# Altium PCB SD_Card_PCB.PcbDoc (part 1 of 2)
Units mil, origin at the board's own origin, x right, y up, seen from the top; angles counter-clockwise.
Board outline 5600 x 4000 mil, 4 copper layers (Top Layer, Plane(Gnd), Plane(Pwr), Bottom Layer), stack 23.756 mil thick; 198 components, 190 nets, 528 pads, 167 vias.
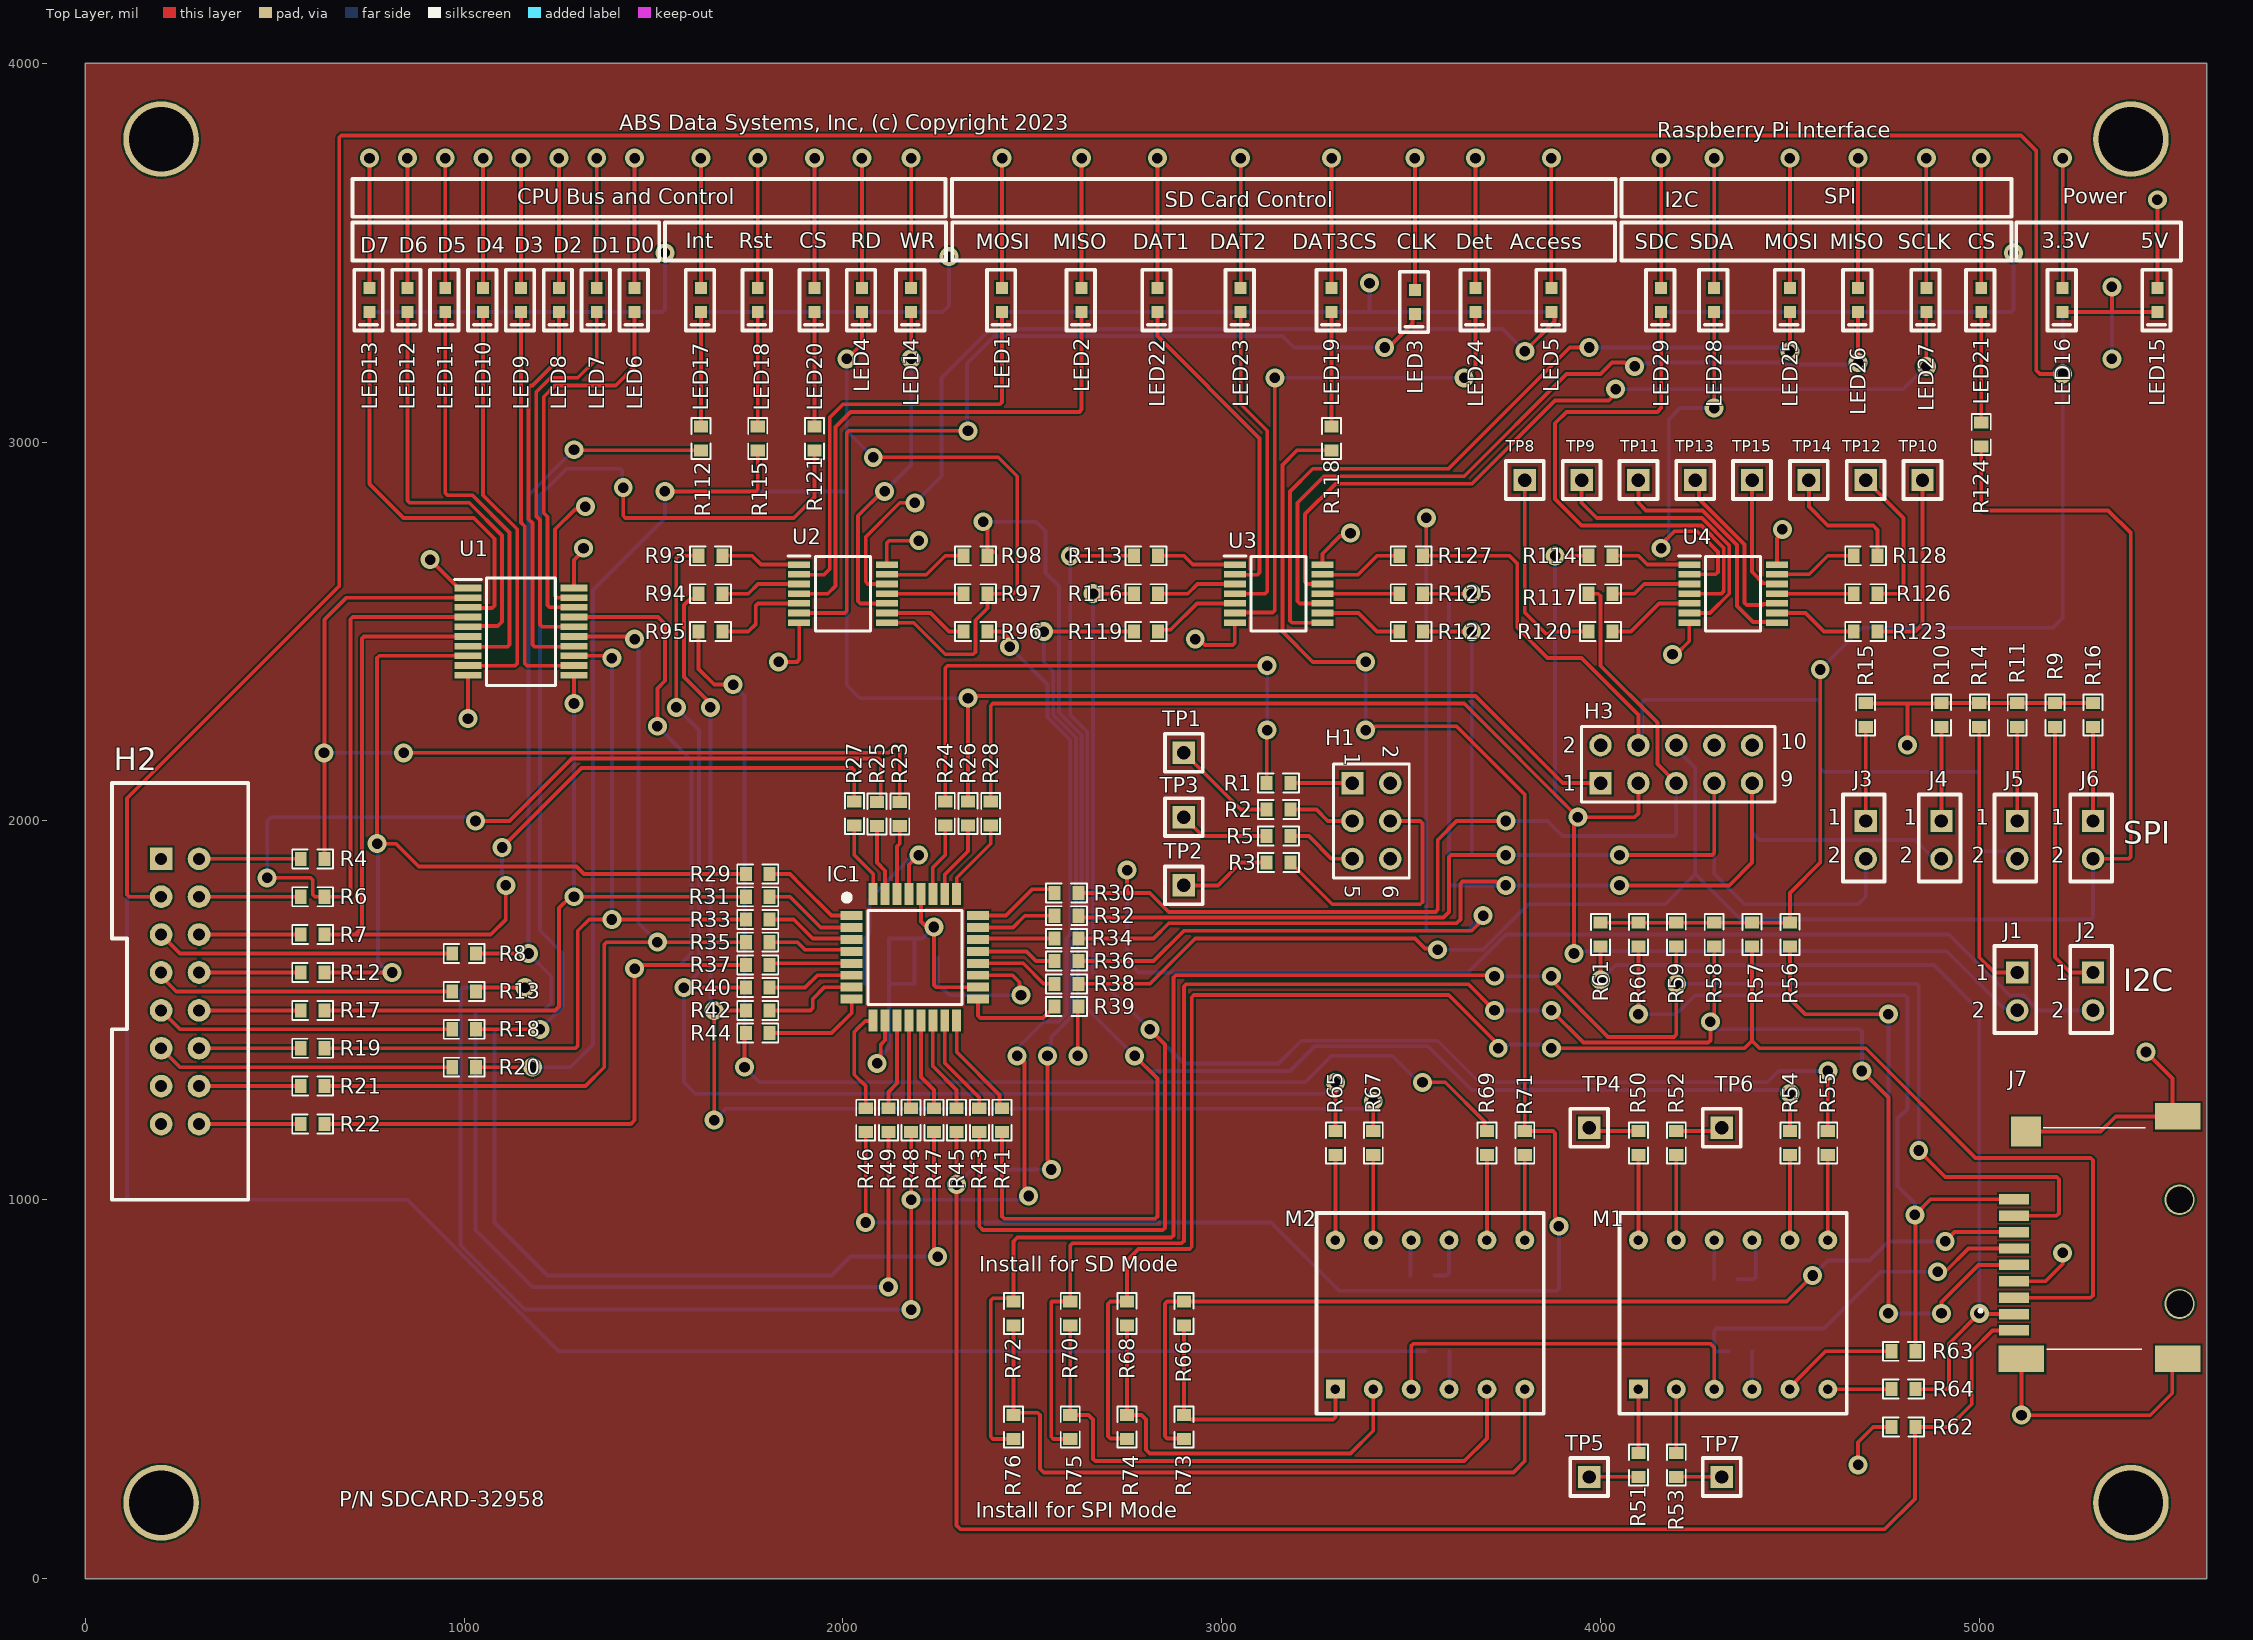
[diagram p0: Top Layer view]
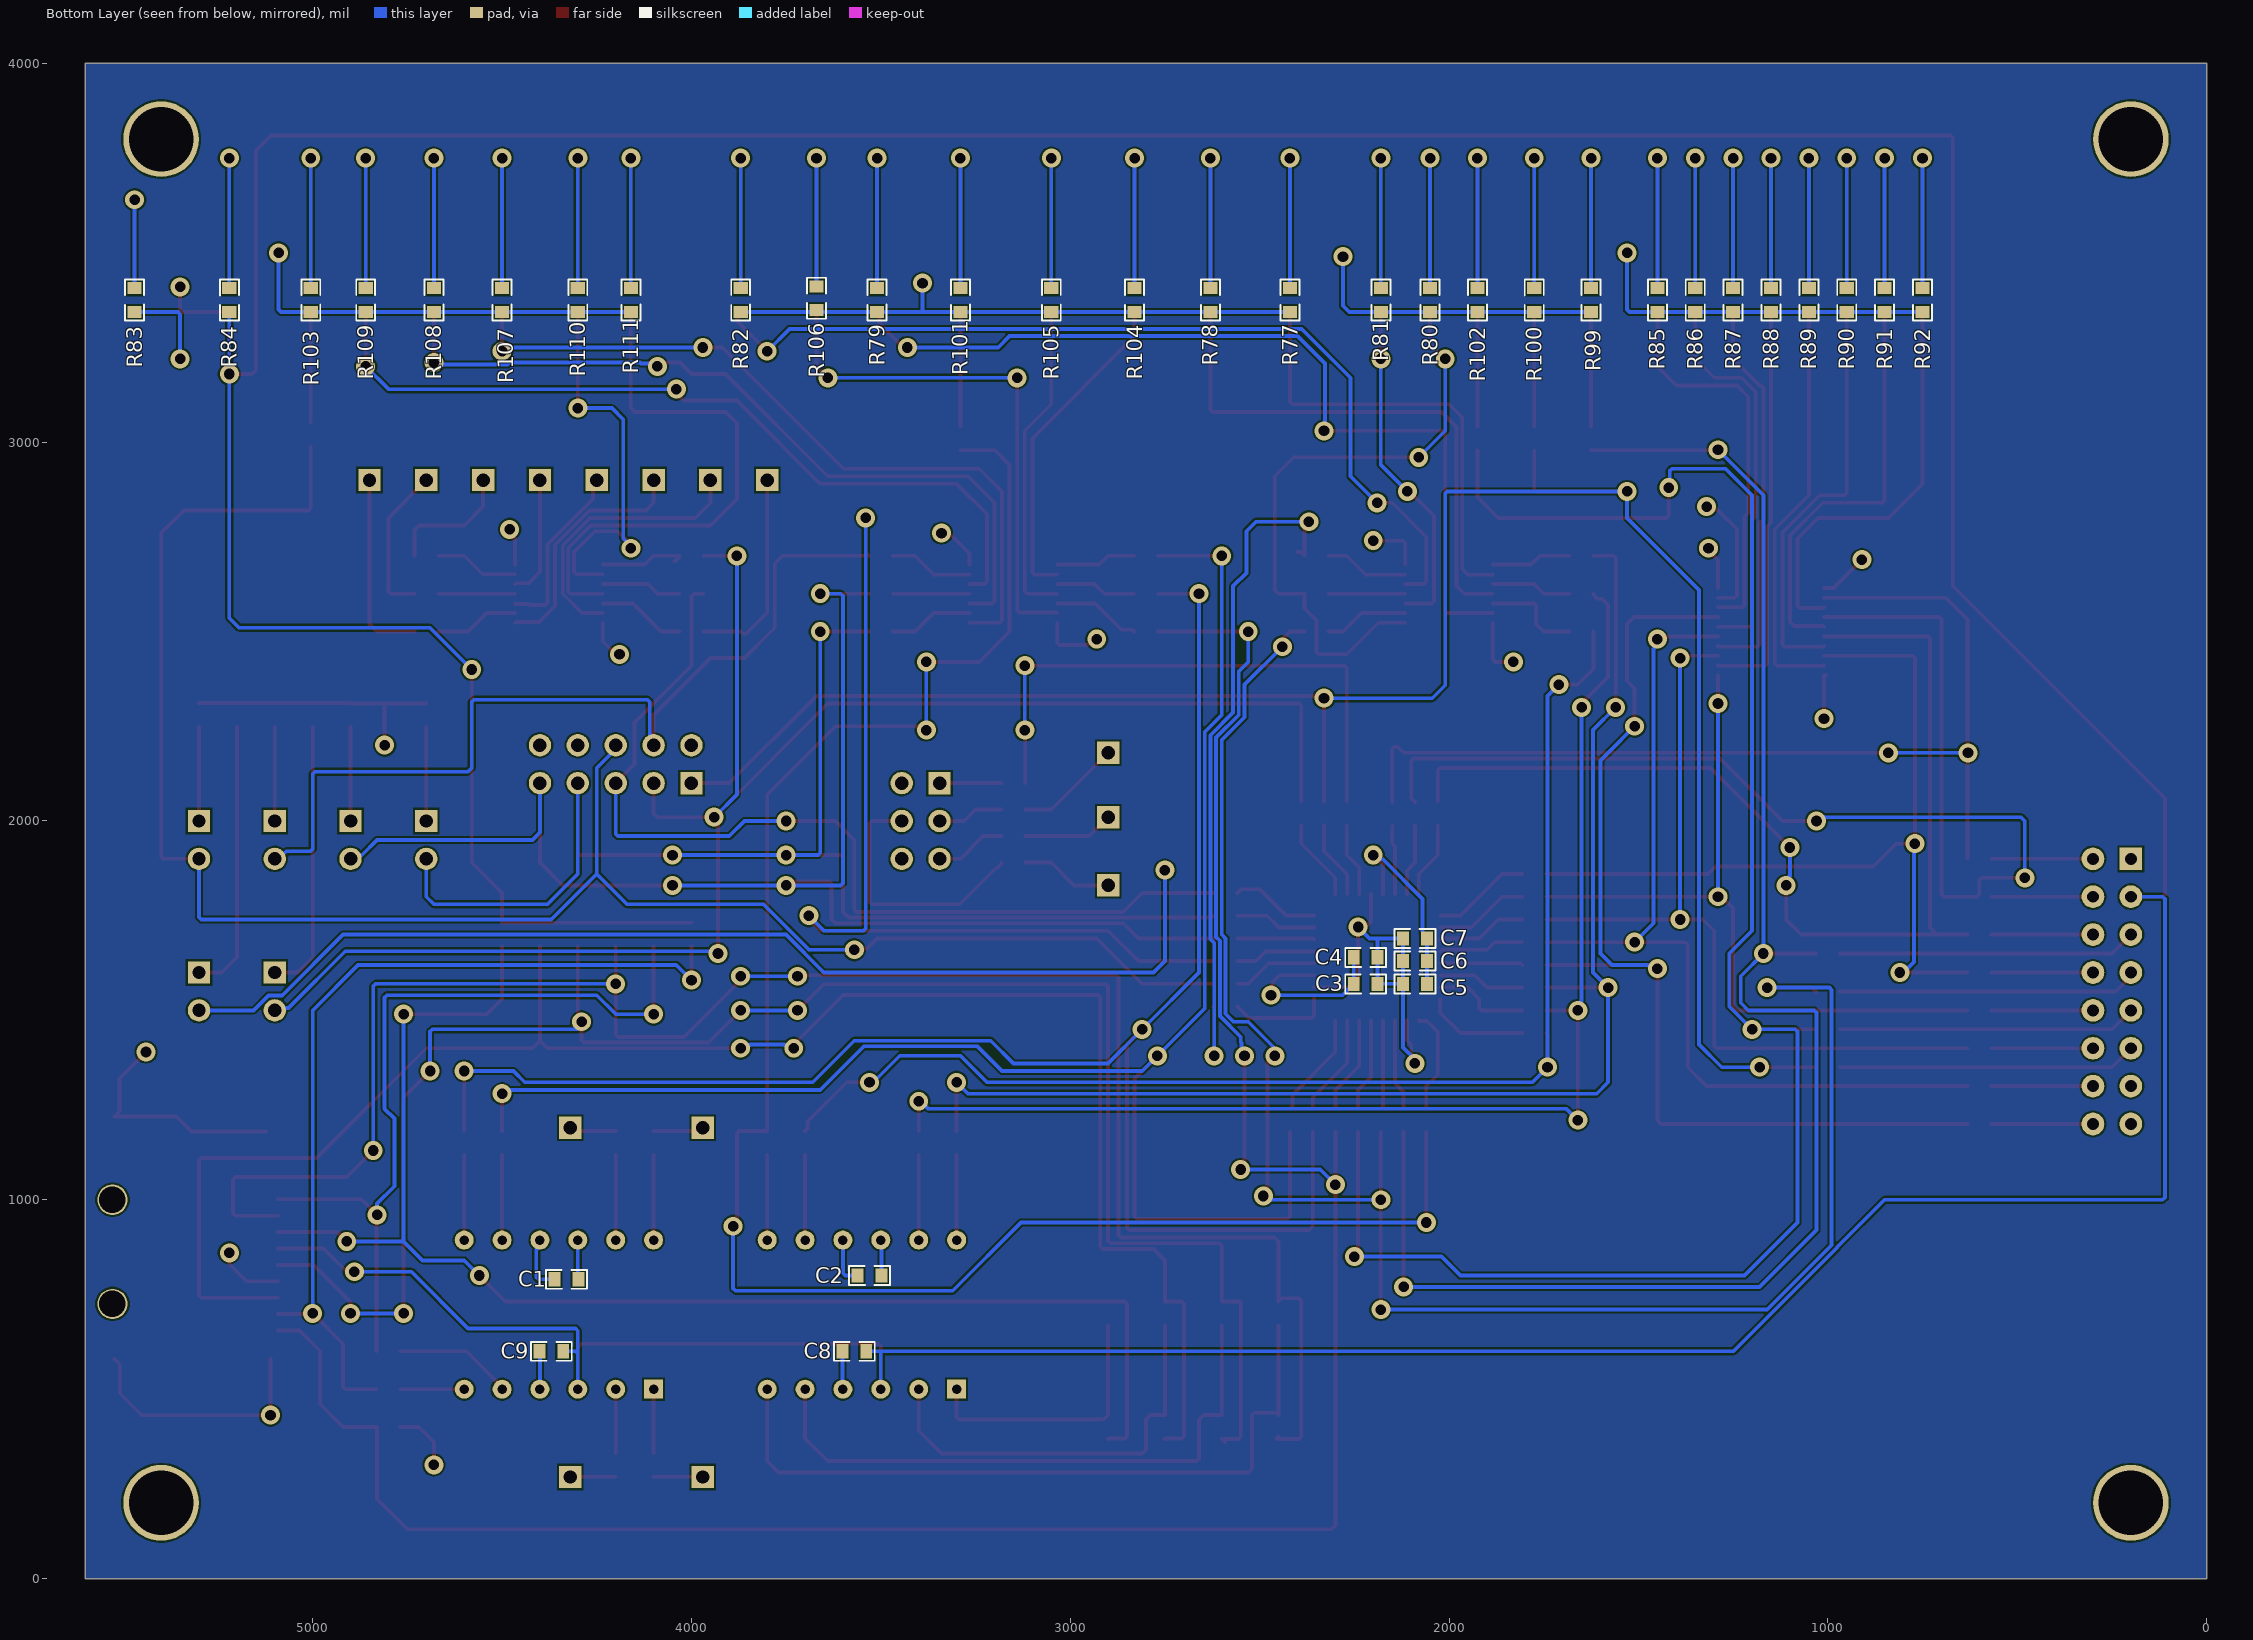
[diagram p1: Bottom Layer view, seen from below]
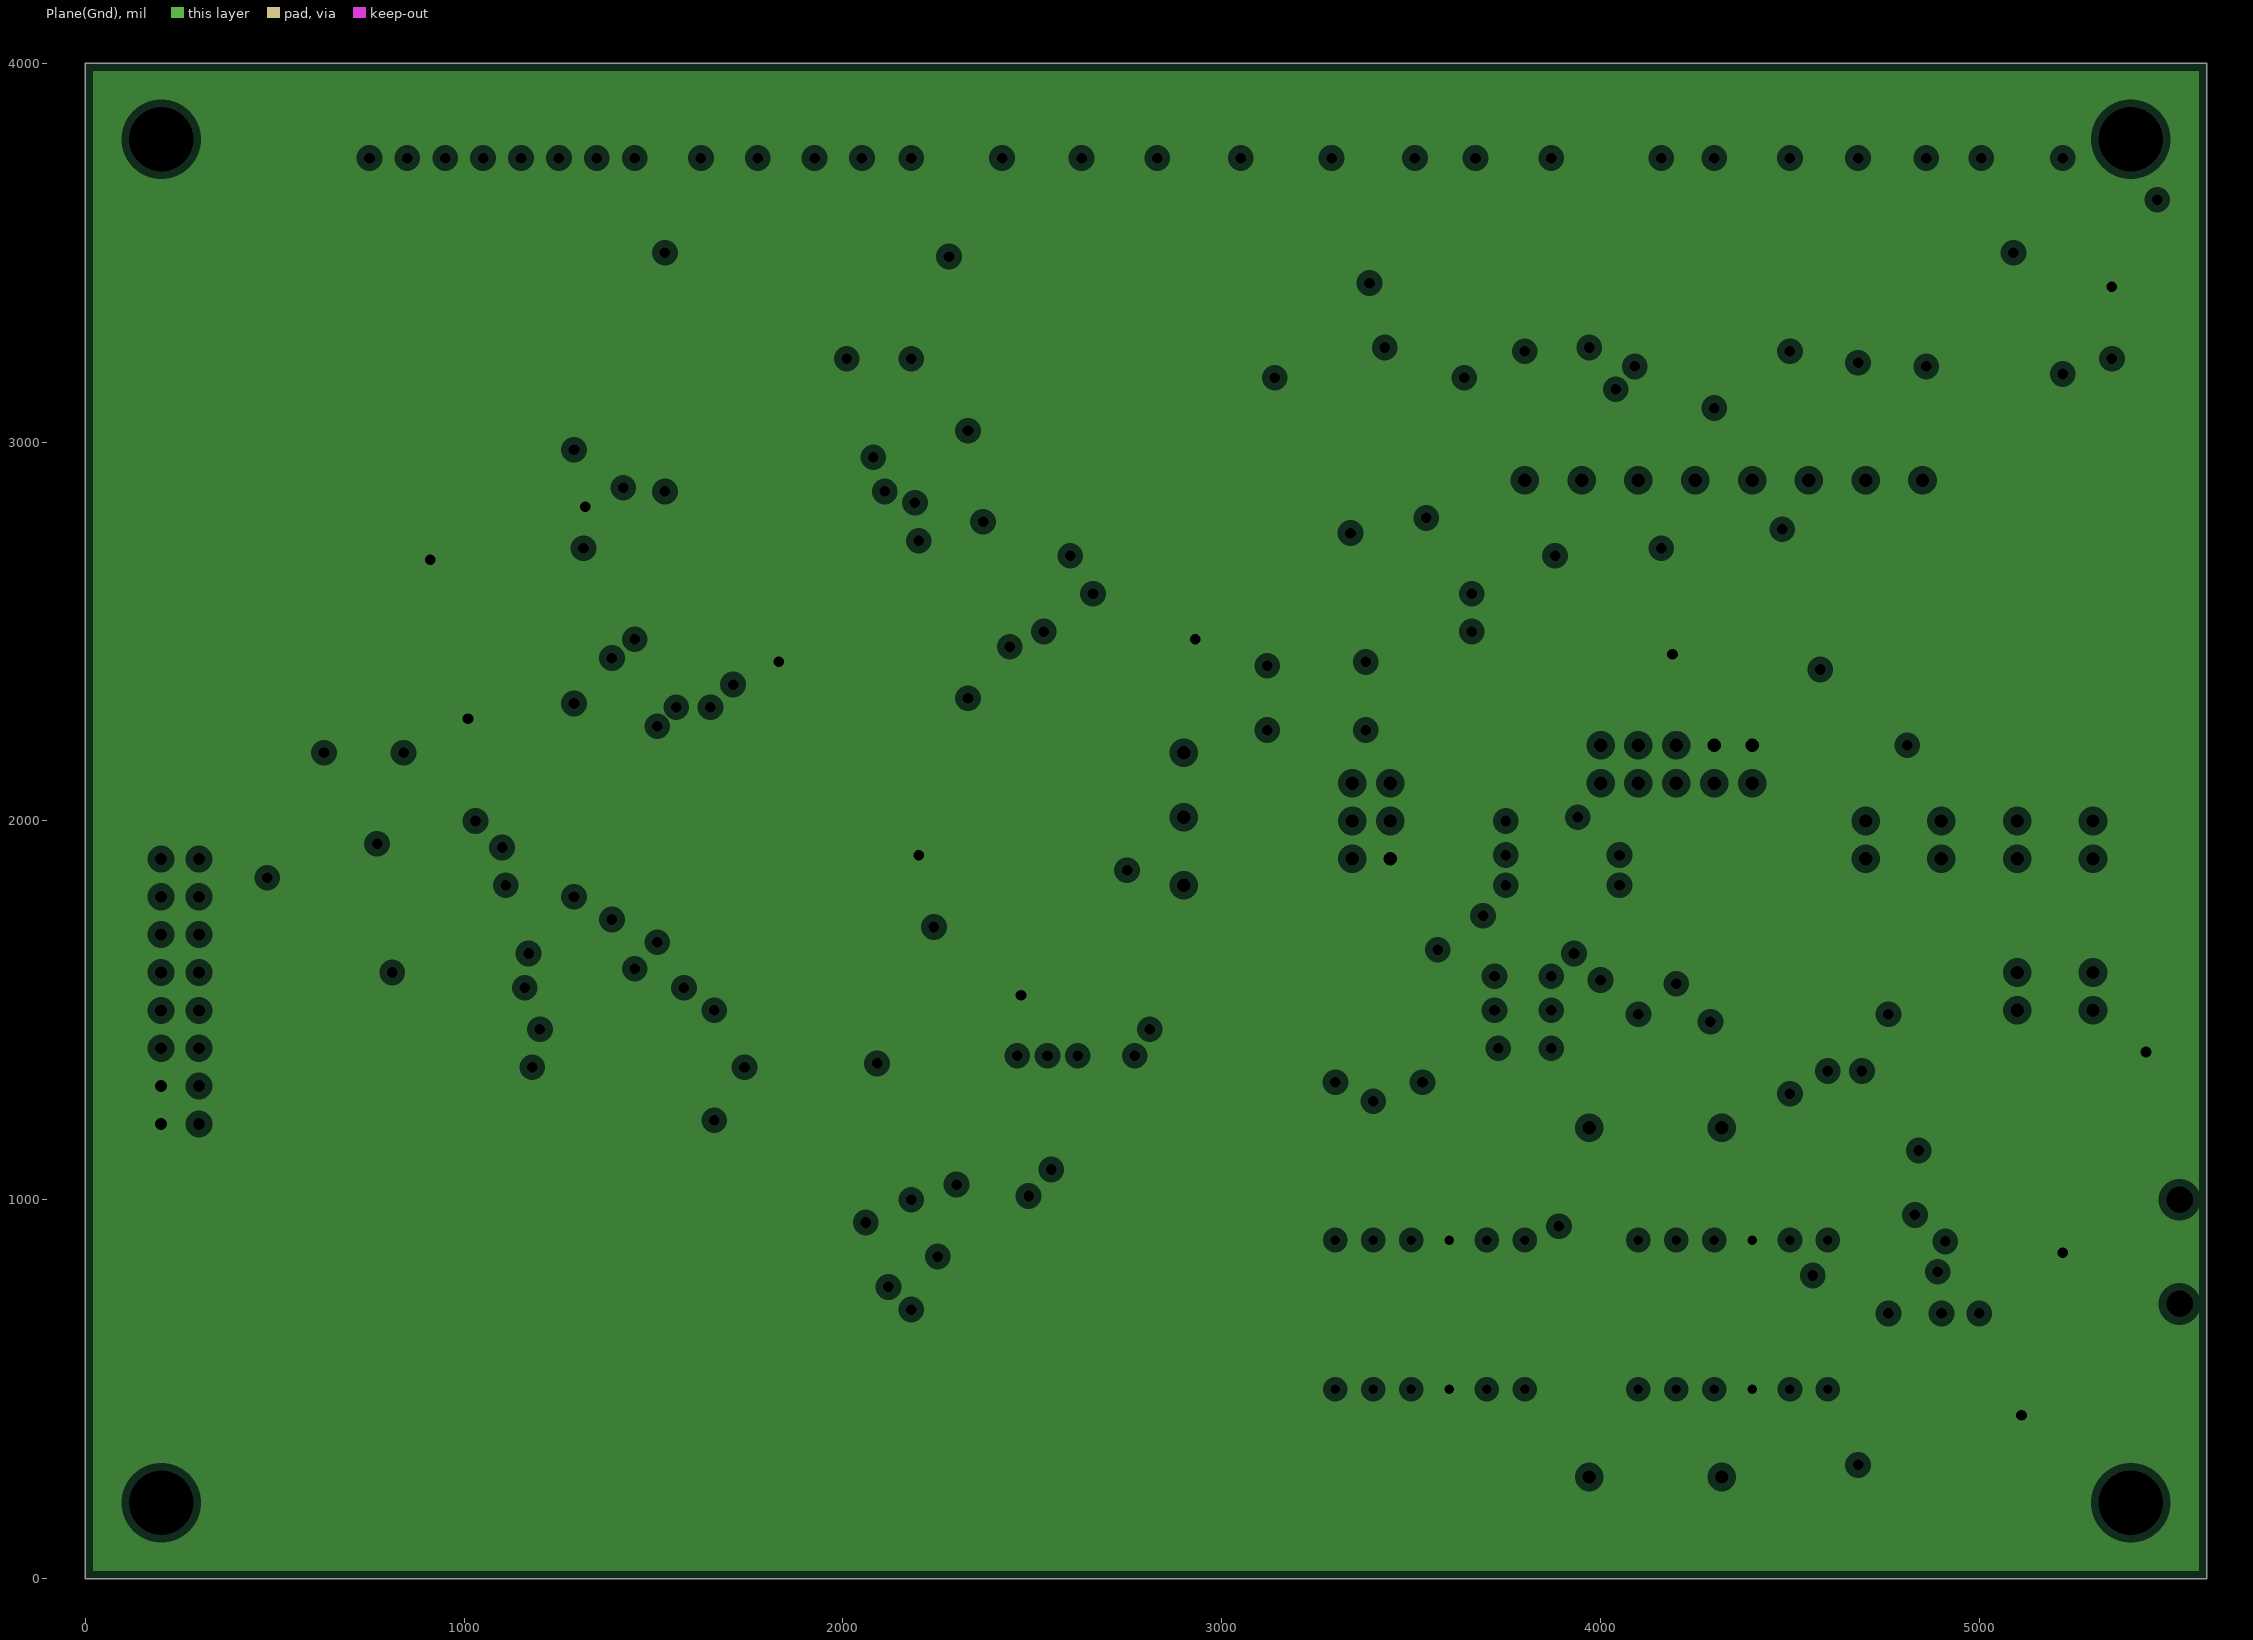
[diagram p2: Plane(Gnd), clearances drawn from the general rule]
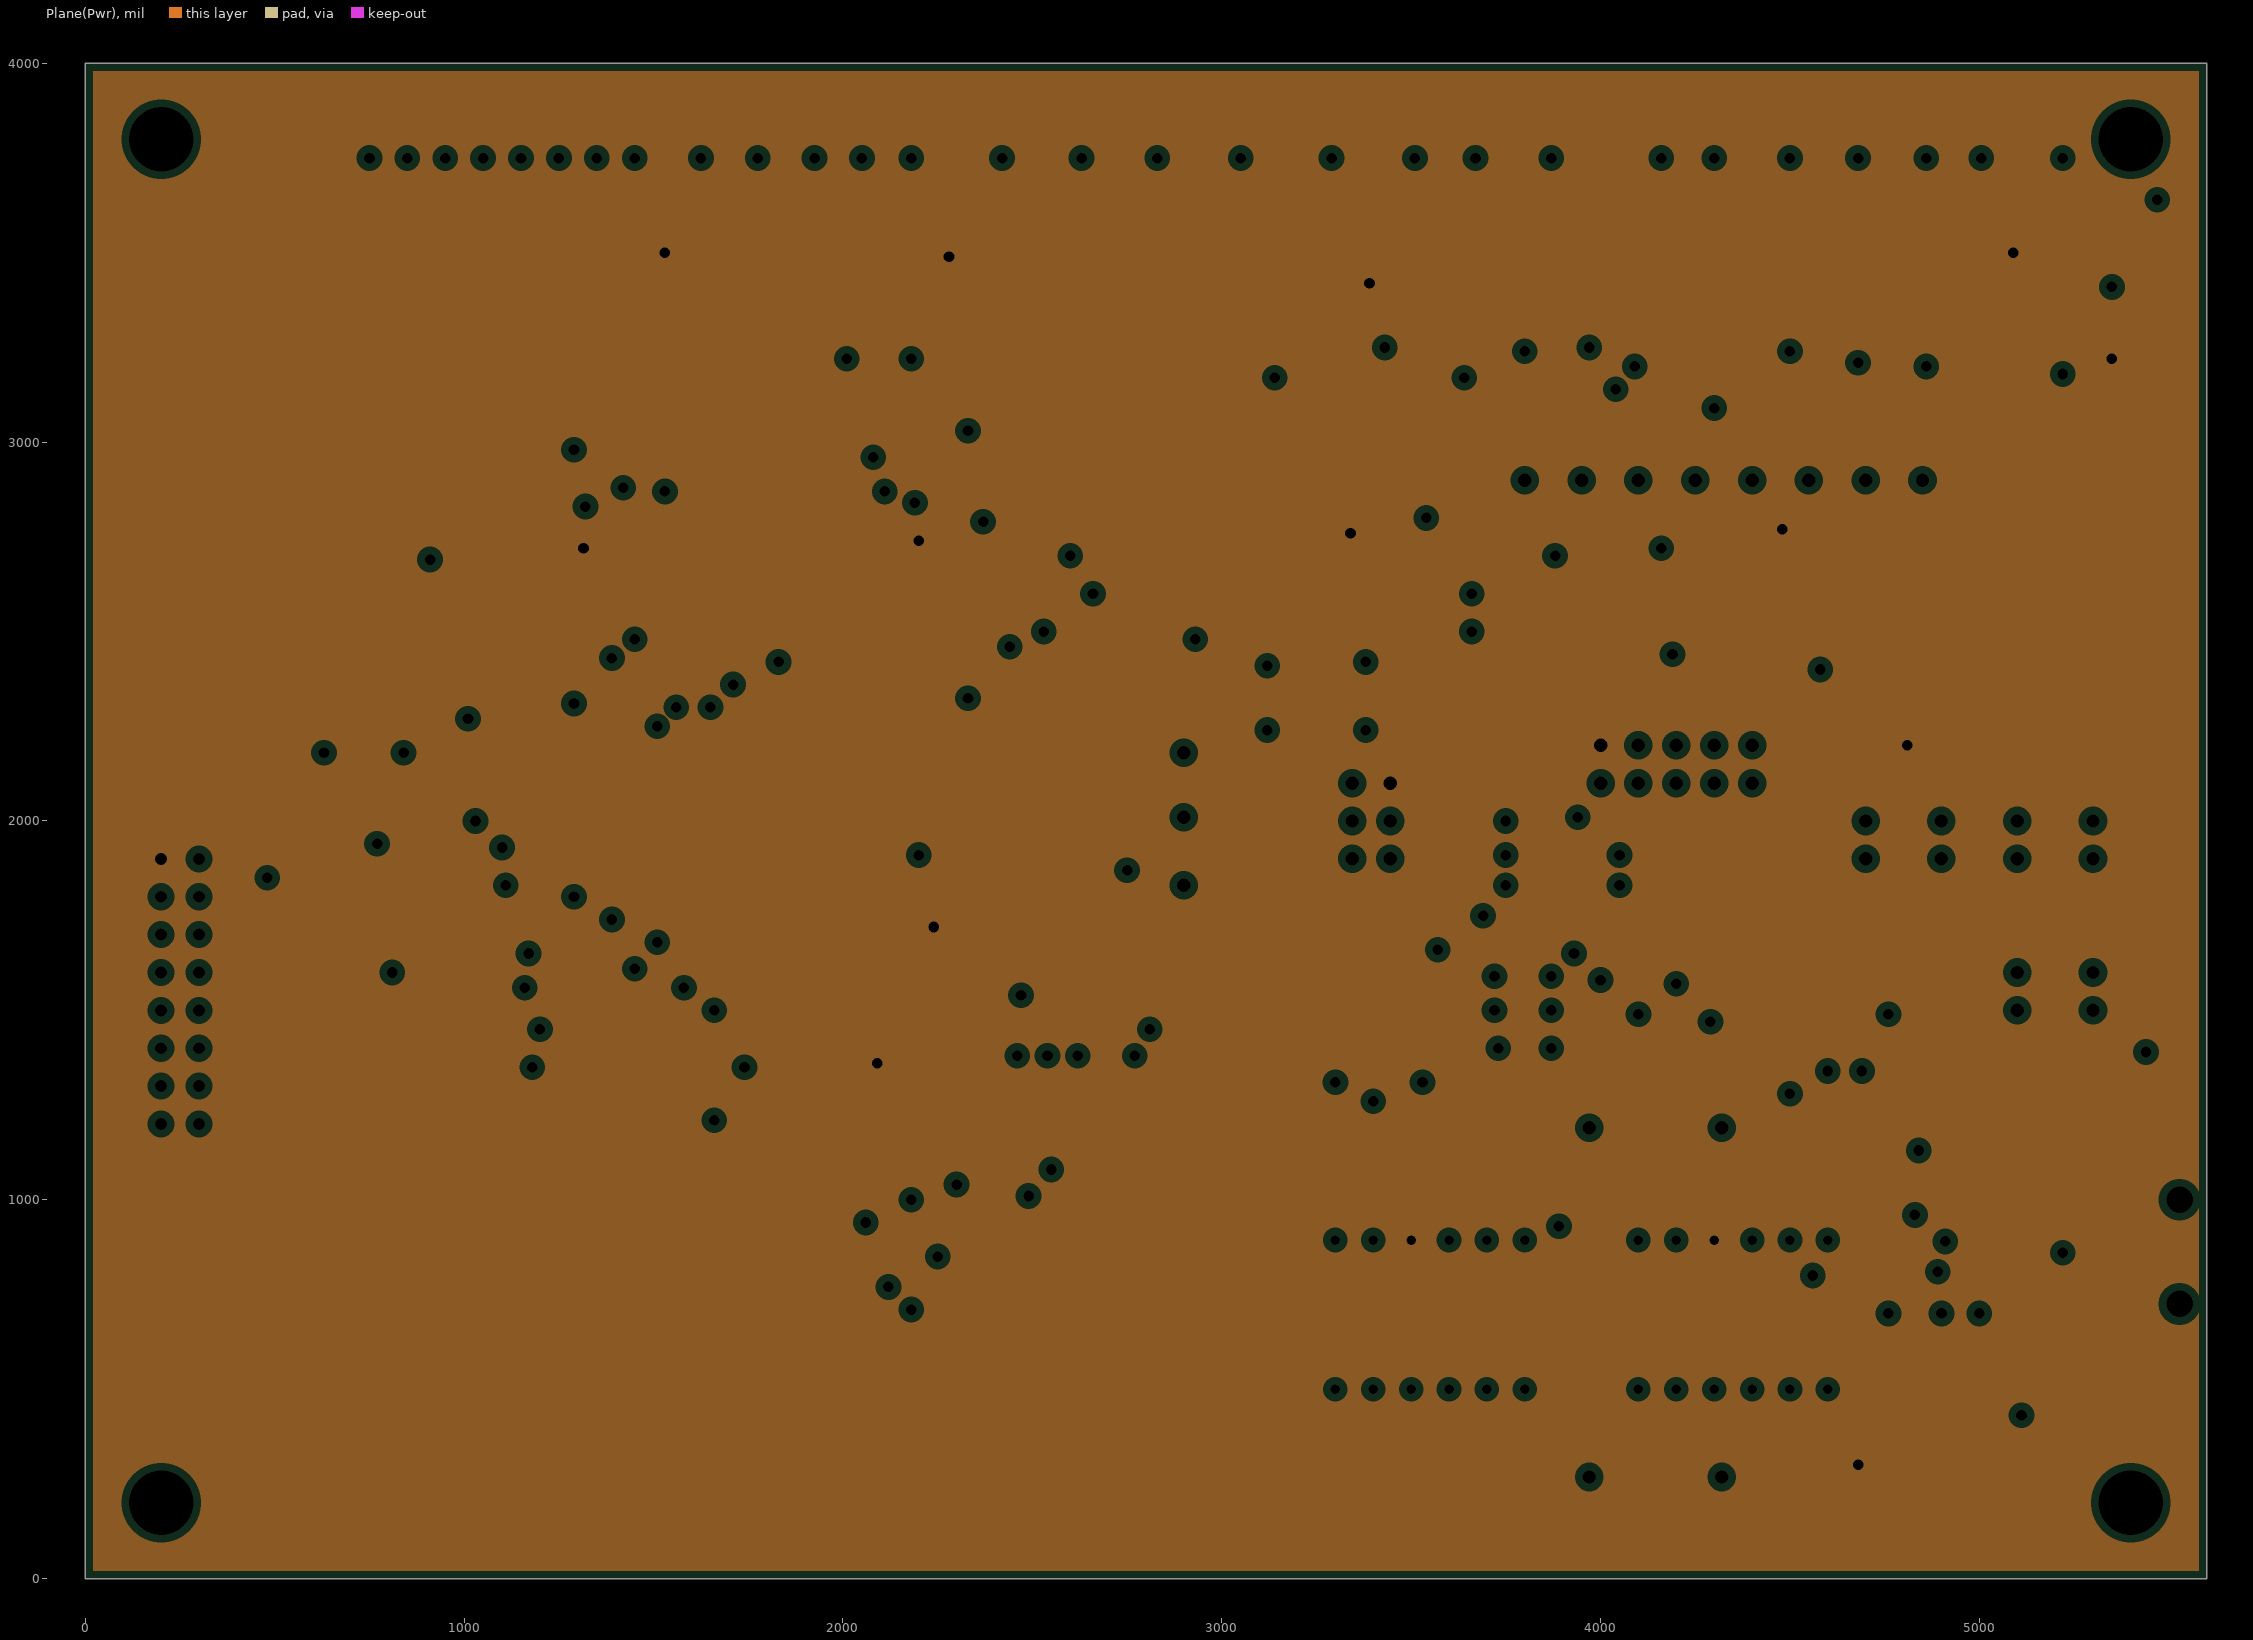
[diagram p3: Plane(Pwr), clearances drawn from the general rule]
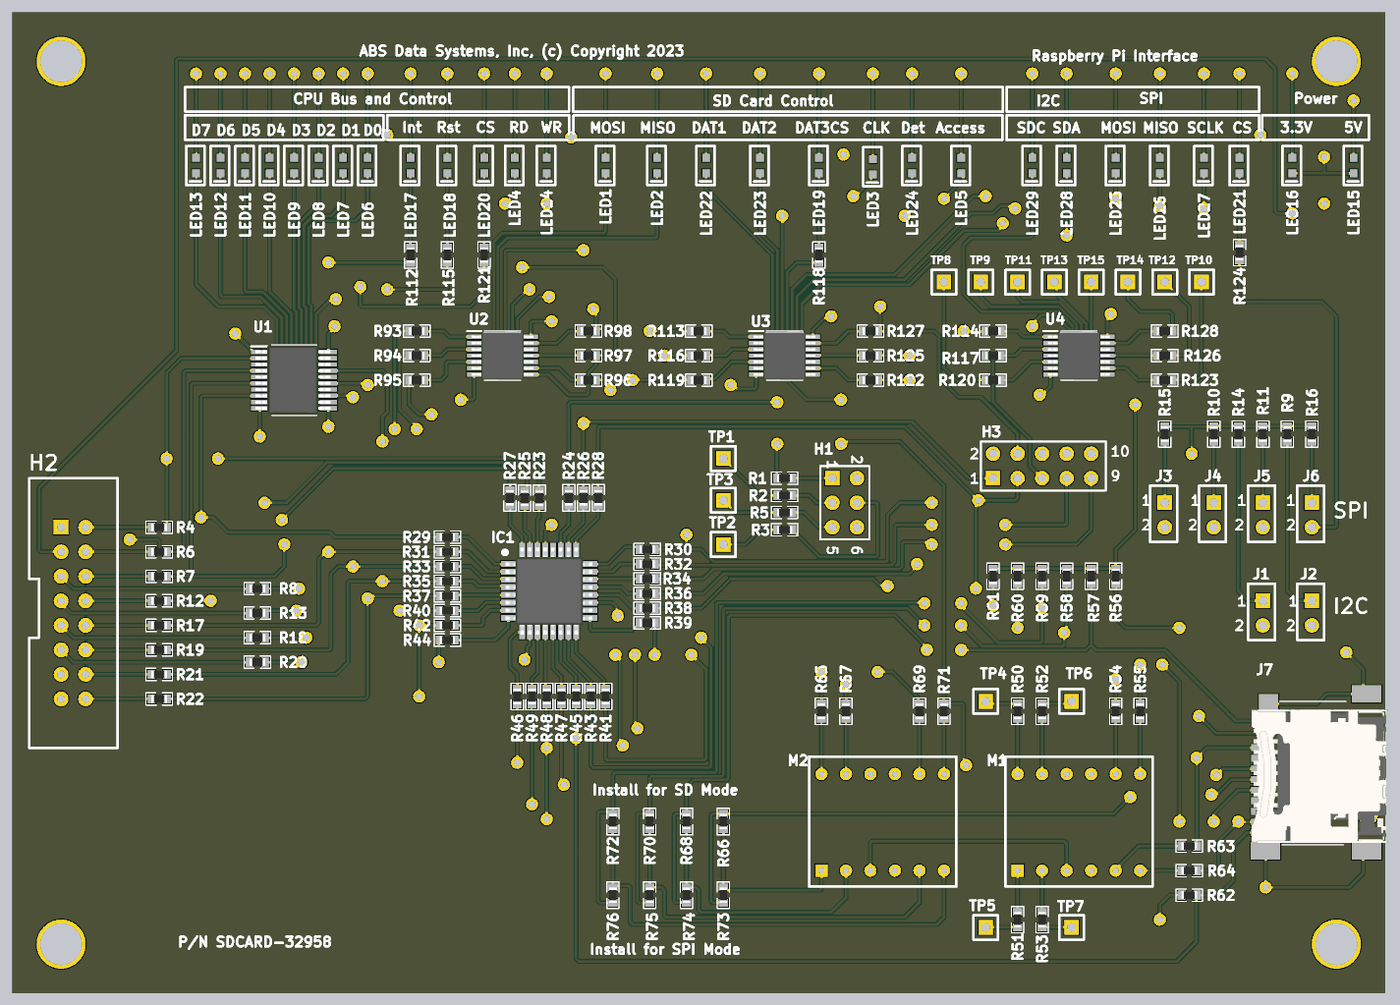
[diagram p5: 3D render of the assembled board from above, using the file's embedded part models]
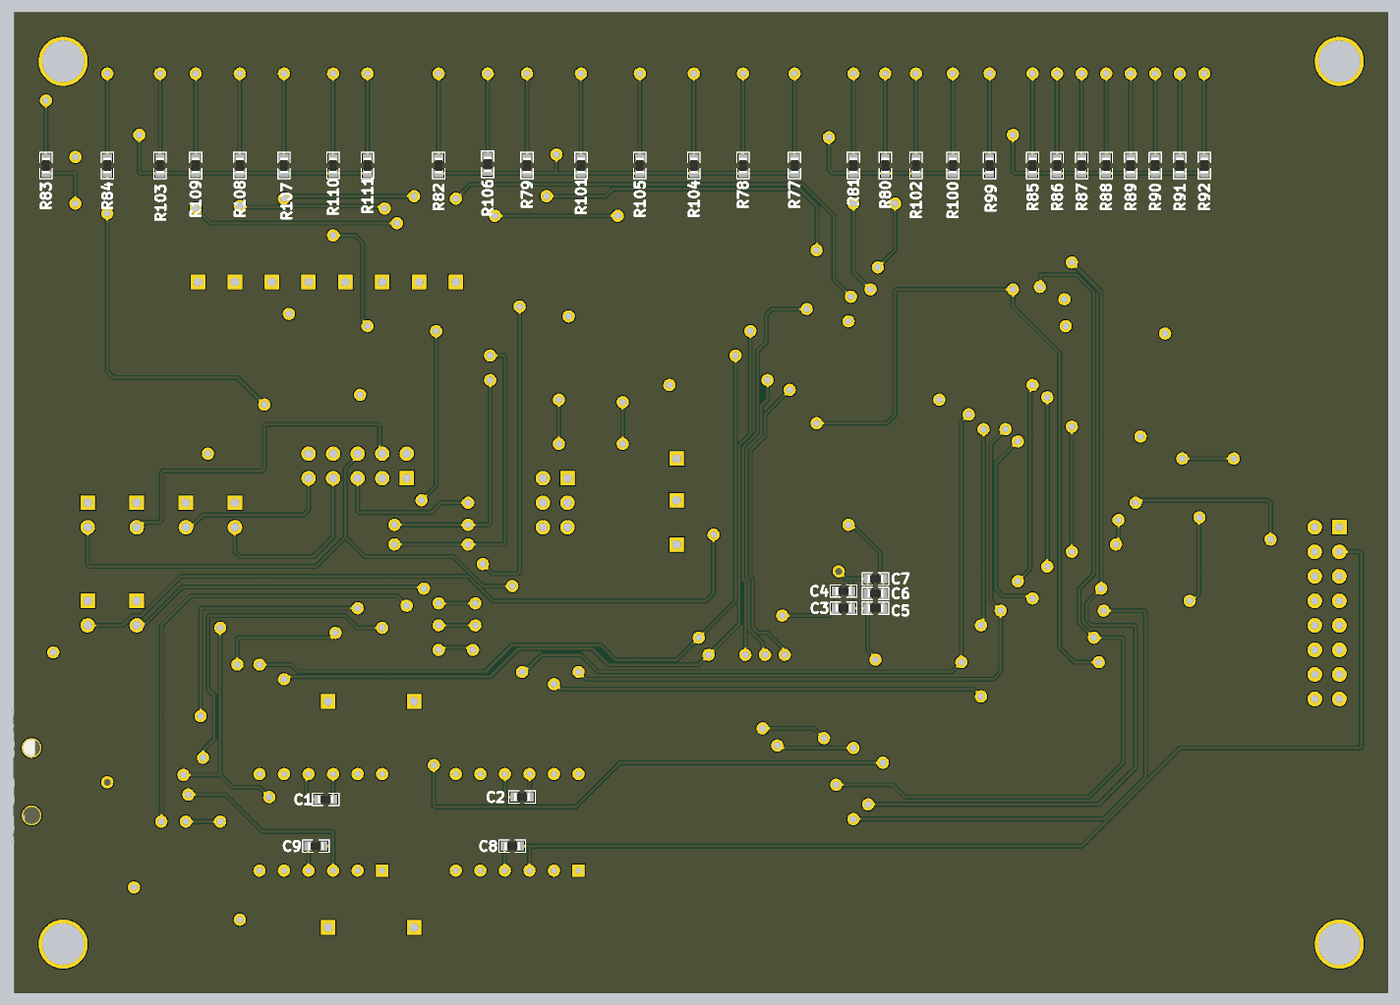
[diagram p6: 3D render of the assembled board from below, using the file's embedded part models]

## Layer stack, top to bottom
Top Solder: solder mask 0.4, Solder Resist, Dk 3.5
Top Layer: signal copper 1.4
Dielectric 2: prepreg 2.8, PP-006, Dk 4.1
Plane(Gnd): plane copper 1.378, net GND
Dielectric 1: dielectric 12.6, FR-4, Dk 4.8
Plane(Pwr): plane copper 1.378, net +5
Dielectric 3: prepreg 2.8, PP-006, Dk 4.1
Bottom Layer: signal copper 1.4
Bottom Solder: solder mask 0.4, Solder Resist, Dk 3.5

## Board outline
0,0 0,4000 5600,4000 5600,0

## Design rules (kind name [scope] priority, off if disabled: settings)
Clearance [All] p1: gap=5 ignorepadtopadclearanceinfootprint=FALSE
HoleSize [All] p1: absolutevalues=TRUE maxlimit=200 minlimit=1 maxpercent=80.000 minpercent=20.000
HoleToHoleClearance [All] p1: gap=5 allowstackedmicrovias=TRUE
MinimumSolderMaskSliver [All] p1: minsoldermaskwidth=5
PlaneClearance [All] p1: clearance=20
PlaneConnect [All] p1: planeconnectstyle=Relief reliefexpansion=20 reliefentries=4 reliefconductorwidth=10 reliefairgap=10
PolygonConnect [All] p1: connectstyle=Relief reliefconductorwidth=10 reliefentries=4 polygonreliefangle="90 Angle" airgapwidth=10
RoutingVias [All] p1: holewidth=28 width=50 viastyle="Through Hole" minholewidth=28 minwidth=50 maxholewidth=28 maxwidth=50
SilkToSilkClearance [All] p1: silktosilkclearance=4
SilkToSolderMaskClearance [IsPad] p1: minsilkscreentomaskgap=3.5 clearancetoexposedcopper=TRUE
SolderMaskExpansion [All] p1: expansion=4 istentingtop=FALSE
Width [All] p1: maxlimit=10 minlimit=5 preferedwidth=10 minimp=50.000000 maximp=50.000000 favimp=50.000000
23 further rules are at their usual default settings.

## Components (designator, comment, footprint, x,y, rotation, side; value= is the part's Value field where it differs from the comment)
C1 "100nf" 0603 4330,790 r0 bottom
C2 "100nf" 0603 3530,800 r0 bottom
C3 "100nf" 0603 2220,1570 r0 bottom
C4 "1nf" 0603 2220,1640 r0 bottom
C5 "1uf" 0603 2090,1570 r180 bottom
C6 "100nf" 0603 2090,1630 r180 bottom
C7 "100nf" 0603 2090,1690 r180 bottom
C8 "100nf" 0603 3570,600 r0 bottom locked
C9 "100nf" 0603 4370,600 r0 bottom locked
H1 "UDPI Programmer" HDR2X3 3345,2100 r270 top locked
H2 "Header_IDC_2x8" HEADER16 200,1900 r0 top locked
H3 "Header_IDC_2x5" HDR2X5 4000,2100 r0 top locked
IC1 "AVR64DD32_SDCard" QFP80P900X900X120-32N 2190,1640 r0 top locked
J1 "Jumper" Jumper 5100,1600 r180 top
J2 "Jumper" Jumper 5300,1600 r180 top
J3 "Jumper" Jumper 4700,2000 r180 top
J4 "Jumper" Jumper 4900,2000 r180 top
J5 "Jumper" Jumper 5100,2000 r180 top
J6 "Jumper" Jumper 5300,2000 r180 top
J7 "SD Micro Card Socket - Amazon" SDMICROCONNECTOR 5310,900 r270 top locked
LED1 "green" 0603_Diode 2420,3375 r90 top locked
LED2 "green" 0603_Diode 2630,3375 r90 top locked
LED3 "green" 0603_Diode 3510,3370 r90 top
LED4 "green" 0603_Diode 2050,3375 r90 top locked
LED5 "green" 0603_Diode 3870,3375 r90 top
LED6 "green" 0603_Diode 1450,3375 r90 top
LED7 "green" 0603_Diode 1350,3375 r90 top
LED8 "green" 0603_Diode 1250,3375 r90 top
LED9 "green" 0603_Diode 1150,3375 r90 top
LED10 "green" 0603_Diode 1050,3375 r90 top
LED11 "green" 0603_Diode 950,3375 r90 top
LED12 "green" 0603_Diode 850,3375 r90 top
LED13 "green" 0603_Diode 750,3375 r90 top
LED14 "red" 0603_Diode 2180,3375 r90 top locked
LED15 "red" 0603_Diode 5470,3375 r90 top
LED16 "amber" 0603_Diode 5220,3375 r90 top
LED17 "amber" 0603_Diode 1625,3375 r90 top locked
LED18 "blue" 0603_Diode 1775,3375 r90 top locked
LED19 "green" 0603_Diode 3290,3375 r90 top locked
LED20 "green" 0603_Diode 1925,3375 r90 top locked
LED21 "green" 0603_Diode 5005,3375 r90 top
LED22 "green" 0603_Diode 2830,3375 r90 top locked
LED23 "green" 0603_Diode 3050,3375 r90 top locked
LED24 "green" 0603_Diode 3670,3375 r90 top
LED25 "green" 0603_Diode 4500,3375 r90 top locked
LED26 "green" 0603_Diode 4680,3375 r90 top locked
LED27 "green" 0603_Diode 4860,3375 r90 top locked
LED28 "green" 0603_Diode 4300,3375 r90 top locked
LED29 "green" 0603_Diode 4160,3375 r90 top locked
M1 "Logic Level Module" LOGIC_LEVEL_MODULE 4100,500 r90 top locked
M2 "Logic Level Module" LOGIC_LEVEL_MODULE 3300,500 r90 top locked
R1 "0R" 0603 3150,2100 r0 top locked
R2 "0R" 0603 3150,2030 r0 top locked
R3 "0R" 0603 3150,1890 r180 top locked
R4 "0R" 0603 600,1900 r180 top locked
R5 "0R" 0603 3150,1960 r0 top locked
R6 "0R" 0603 600,1800 r180 top locked
R7 "0R" 0603 600,1700 r180 top locked
R8 "0R" 0603 1000,1650 r0 top locked
R9 "4.7k" 0603 5200,2280 r90 top
R10 "4.7k" 0603 4900,2280 r90 top
R11 "4.7k" 0603 5100,2280 r90 top
R12 "0R" 0603 600,1600 r180 top locked
R13 "0R" 0603 1000,1550 r0 top locked
R14 "4.7k" 0603 5000,2280 r90 top
R15 "4.7k" 0603 4700,2280 r90 top locked
R16 "4.7k" 0603 5300,2280 r270 top
R17 "0R" 0603 600,1500 r180 top locked
R18 "0R" 0603 1000,1450 r0 top locked
R19 "0R" 0603 600,1400 r180 top locked
R20 "0R" 0603 1000,1350 r0 top locked
R21 "0R" 0603 600,1300 r180 top locked
R22 "0R" 0603 600,1200 r180 top locked
R23 "0R" 0603 2150,2018.5 r270 top locked
R24 "0R" 0603 2270,2020 r90 top locked
R25 "0R" 0603 2090,2018.5 r270 top locked
R26 "0R" 0603 2330,2020 r90 top locked
R27 "0R" 0603 2030,2020 r270 top locked
R28 "0R" 0603 2390,2020 r90 top locked
R29 "0R" 0603 1775,1860 r0 top locked
R30 "0R" 0603 2590,1810 r0 top locked
R31 "0R" 0603 1775,1800 r0 top locked
R32 "0R" 0603 2590,1750 r0 top locked
R33 "0R" 0603 1775,1740 r0 top locked
R34 "0R" 0603 2590,1690 r0 top locked
R35 "0R" 0603 1775,1680 r0 top locked
R36 "0R" 0603 2590,1630 r0 top locked
R37 "0R" 0603 1775,1620 r0 top locked
R38 "0R" 0603 2590,1570 r0 top locked
R39 "0R" 0603 2590,1510 r0 top locked
R40 "0R" 0603 1775,1560 r0 top locked
R41 "0R" 0603 2420,1210 r270 top locked
R42 "0R" 0603 1775,1500 r0 top locked
R43 "0R" 0603 2360,1210 r270 top locked
R44 "0R" 0603 1775,1440 r0 top locked
R45 "0R" 0603 2300,1210 r270 top locked
R46 "0R" 0603 2060,1210 r90 top locked
R47 "0R" 0603 2240,1210 r270 top locked
R48 "0R" 0603 2180,1210 r270 top locked
R49 "0R" 0603 2120,1210 r270 top locked
R50 "0R" 0603 4100,1150 r270 top locked
R51 "0R" 0603 4100,300 r270 top
R52 "0R" 0603 4200,1150 r270 top locked
R53 "0R" 0603 4200,300 r270 top
R54 "0R" 0603 4500,1150 r270 top
R55 "0R" 0603 4600,1150 r270 top
R56 "4.7k" 0603 4500,1700 r90 top
R57 "4.7k" 0603 4400,1700 r90 top
R58 "4.7k" 0603 4300,1700 r90 top
R59 "4.7k" 0603 4200,1700 r90 top
R60 "4.7k" 0603 4100,1700 r90 top
R61 "4.7k" 0603 4000,1700 r90 top
R62 "4.7k" 0603 4800,400 r180 top
R63 "0R" 0603 4800,600 r0 top
R64 "0R" 0603 4800,500 r0 top
R65 "0R" 0603 3300,1150 r270 top
R66 "0R" 0603 2900,700 r90 top
R67 "0R" 0603 3400,1150 r270 top
R68 "0R" 0603 2750,700 r90 top
R69 "0R" 0603 3700,1150 r270 top
R70 "0R" 0603 2600,700 r90 top
R71 "0R" 0603 3800,1150 r270 top
R72 "0R" 0603 2450,700 r90 top
R73 "0R" 0603 2900,400 r270 top
R74 "0R" 0603 2750,400 r270 top
R75 "0R" 0603 2600,400 r270 top
R76 "0R" 0603 2450,400 r270 top
R77 "180" 0603 2420,3375 r270 bottom locked
R78 "180" 0603 2630,3375 r270 bottom locked
R79 "180" 0603 3510,3375 r270 bottom
R80 "180" 0603 2050,3375 r270 bottom locked
R81 "180" 0603 2180,3375 r270 bottom locked
R82 "180" 0603 3870,3375 r270 bottom
R83 "180" 0603 5470,3375 r270 bottom locked
R84 "47" 0603 5220,3375 r90 bottom locked
R85 "180" 0603 1450,3375 r270 bottom
R86 "180" 0603 1350,3375 r270 bottom
R87 "180" 0603 1250,3375 r270 bottom
R88 "180" 0603 1150,3375 r270 bottom
R89 "180" 0603 1050,3375 r270 bottom
R90 "180" 0603 950,3375 r270 bottom
R91 "180" 0603 850,3375 r270 bottom
R92 "180" 0603 750,3375 r270 bottom
R93 "0R" 0603 1650,2700 r0 top locked
R94 "0R" 0603 1650,2600 r0 top locked
R95 "0R" 0603 1650,2500 r0 top locked
R96 "0R" 0603 2350,2500 r180 top
R97 "0R" 0603 2350,2600 r180 top
R98 "0R" 0603 2350,2700 r180 top
R99 "180" 0603 1625,3375 r270 bottom locked
R100 "100" 0603 1775,3375 r90 bottom locked
R101 "180" 0603 3290,3375 r270 bottom locked
R102 "180" 0603 1925,3375 r270 bottom locked
R103 "180" 0603 5005,3375 r270 bottom
R104 "180" 0603 2830,3375 r270 bottom locked
R105 "180" 0603 3050,3375 r270 bottom locked
R106 "180" 0603 3670,3380 r270 bottom
R107 "180" 0603 4500,3375 r270 bottom locked
R108 "180" 0603 4680,3375 r270 bottom locked
R109 "180" 0603 4860,3375 r270 bottom locked
R110 "180" 0603 4300,3375 r270 bottom locked
R111 "180" 0603 4160,3375 r270 bottom locked
R112 "0R" 0603 1625,3010 r90 top locked
R113 "0R" 0603 2800,2700 r0 top locked
R114 "0R" 0603 4000,2700 r0 top locked
R115 "0R" 0603 1775,3010 r90 top locked
R116 "0R" 0603 2800,2600 r0 top locked
R117 "0R" 0603 4000,2600 r0 top locked
R118 "0R" 0603 3290,3010 r90 top locked
R119 "0R" 0603 2800,2500 r0 top locked
R120 "0R" 0603 4000,2500 r0 top locked
R121 "0R" 0603 1925,3010 r90 top locked
R122 "0R" 0603 3500,2500 r180 top locked
R123 "0R" 0603 4700,2500 r180 top locked
R124 "0R" 0603 5005,3020 r90 top
R125 "0R" 0603 3500,2600 r180 top locked
R126 "0R" 0603 4700,2600 r180 top locked
R127 "0R" 0603 3500,2700 r180 top locked
R128 "0R" 0603 4700,2700 r180 top locked
TP1 "TP" TP 2900,2180 r0 top locked
TP2 "TP" TP 2900,1830 r0 top locked
TP3 "TP" TP 2900,2010 r0 top locked
TP4 "TP" TP 3970,1190 r0 top locked
TP5 "TP" TP 3970,268 r0 top
TP6 "TP" TP 4320,1190 r0 top
TP7 "TP" TP 4320,268 r0 top
TP8 "TP" TP 3800,2900 r0 top
TP9 "TP" TP 3950,2900 r0 top
TP10 "TP" TP 4850,2900 r0 top
TP11 "TP" TP 4100,2900 r0 top
TP12 "TP" TP 4700,2900 r0 top
TP13 "TP" TP 4250,2900 r0 top
TP14 "TP" TP 4550,2900 r0 top
TP15 "TP" TP 4400,2900 r0 top
U1 "SN74ABT240ADBR" SOP65P780X200-20N 1150,2500 r0 top locked
U2 "SN74AC04PWR" SOP65P640X120-14N 2000,2600 r0 top locked
U3 "SN74AC04PWR" SOP65P640X120-14N 3150,2600 r0 top locked
U4 "SN74AC04PWR" SOP65P640X120-14N 4350,2600 r0 top locked

## Footprints (in the part's own frame and the unit in brackets; to place one, negate y for a bottom-side part, rotate by r counter-clockwise, add the part's x,y. Pads: shape width x height; smd on the part's side, far side on the other; paste and mask are expansions set on the pad)
0603 [mm]
  rect 0.8x0.95 smd: 1(-0.8,0) 2(0.8,0)
  silkscreen extent -1.37,-0.64 1.37,0.64, body extent -0.8,-0.4 0.8,0.4, height 0.55
0603_Diode [mm]
  rect 0.8x0.8 smd: 1(-0.8,0) 2(0.8,0)
  silkscreen extent -2.03,-0.89 2.03,1.02
HDR2X3 [mm] "Connector; Header; 3x2 Position"
  rect 1.5x1.5 hole 0.9: 1(0,0)
  round 1.5 hole 0.9: 2(0,2.54) 3(2.54,0) 4(2.54,2.54) 5(5.08,0) 6(5.08,2.54)
  silkscreen extent -1.27,-1.27 6.35,3.81
HDR2X5 [mm] "Connector; Header; 5x2 Position"
  rect 1.5x1.5 hole 0.9: 1(0,0)
  round 1.5 hole 0.9: 2(0,2.54) 3(2.54,0) 4(2.54,2.54) 5(5.08,0) 6(5.08,2.54) 7(7.62,0) 8(7.62,2.54) 9(10.16,0) 10(10.16,2.54)
  silkscreen extent -1.27,-1.27 11.68,3.81
HEADER16 [mil]
  rect 60x60 hole 31.5: 1(0,0)
  round 60 hole 31.5: 2(100,0) 3(0,-100) 4(100,-100) 5(0,-200) 6(100,-200) 7(0,-300) 8(100,-300) 9(0,-400) 10(100,-400) 11(0,-500) 12(100,-500) 13(0,-600) 14(100,-600) 15(0,-700) 16(100,-700)
  silkscreen extent -130,-900 230,200
Jumper [mm] "Connector; Header; 8x2 Position"
  rect 1.5x1.5 hole 0.9: 1(0,0)
  round 1.5 hole 0.9: 2(0,2.54)
  silkscreen extent -1.27,-1.78 1.52,4.06
LOGIC_LEVEL_MODULE [mm]
  rect 1.27x1.27 hole 0.635: 1(0,0)
  round 1.27 hole 0.635: 2(0,-2.54) 3(0,-5.08) 4(0,-7.62) 5(0,-10.16) 6(0,-12.7) 7(10,-12.7) 8(10,-10.16) 9(10,-7.62) 10(10,-5.08) 11(10,-2.54) 12(10,0)
  silkscreen extent -1.65,-13.97 11.81,1.27
QFP80P900X900X120-32N [mm]
  rect 1.475x0.6 smd: 1(-4.238,2.8) 2(-4.238,2) 3(-4.238,1.2) 4(-4.238,0.4) 5(-4.238,-0.4) 6(-4.238,-1.2) 7(-4.238,-2) 8(-4.238,-2.8) 17(4.238,-2.8) 18(4.238,-2) 19(4.238,-1.2) 20(4.238,-0.4) 21(4.238,0.4) 22(4.238,1.2) 23(4.238,2) 24(4.238,2.8)
  rect 0.6x1.475 smd: 9(-2.8,-4.238) 10(-2,-4.238) 11(-1.2,-4.238) 12(-0.4,-4.238) 13(0.4,-4.238) 14(1.2,-4.238) 15(2,-4.238) 16(2.8,-4.238) 25(2.8,4.238) 26(2,4.238) 27(1.2,4.238) 28(0.4,4.238) 29(-0.4,4.238) 30(-1.2,4.238) 31(-2,4.238) 32(-2.8,4.238)
  silkscreen extent -4.77,-3.15 3.15,4.2, body extent -4.5,-4.5 4.5,4.5, height 1.2
SDMICROCONNECTOR [mm]
  rect 0.7x2 smd: 1(-2.571,-5.542) 2(-1.471,-5.542) 3(-0.371,-5.549) 4(0.729,-5.549) 5(1.829,-5.549) 6(2.929,-5.549) 7(4.029,-5.549) 8(5.129,-5.549) 9(6.223,-5.549)
  round 2.032 hole 1.778: H1(-2.54,5.55) H2(4.445,5.55)
  rect 2x2 smd: MP1(-7.112,-4.737)
  rect 1.778x3.048 smd: MP2(8.128,-5.049) MP3(-8.128,5.423) MP4(8.128,5.423)
  silkscreen extent -7.37,-7.9 7.49,3.26, body extent -9.62,-2.98 10.38,3.77, height 5.8
SOP65P640X120-14N [mm]
  rect 1.475x0.45 smd: 1(-2.938,1.95) 2(-2.938,1.3) 3(-2.938,0.65) 4(-2.938,0) 5(-2.938,-0.65) 6(-2.938,-1.3) 7(-2.938,-1.95) 8(2.938,-1.95) 9(2.938,-1.3) 10(2.938,-0.65) 11(2.938,0) 12(2.938,0.65) 13(2.938,1.3) 14(2.938,1.95)
  silkscreen extent -3.67,-2.5 1.85,2.52, body extent -3.2,-2.5 3.2,2.5, height 1.13
SOP65P780X200-20N [mm]
  rect 1.8x0.45 smd: 1(-3.55,2.925) 2(-3.55,2.275) 3(-3.55,1.625) 4(-3.55,0.975) 5(-3.55,0.325) 6(-3.55,-0.325) 7(-3.55,-0.975) 8(-3.55,-1.625) 9(-3.55,-2.275) 10(-3.55,-2.925) 11(3.55,-2.925) 12(3.55,-2.275) 13(3.55,-1.625) 14(3.55,-0.975) 15(3.55,-0.325) 16(3.55,0.325) 17(3.55,0.975) 18(3.55,1.625) 19(3.55,2.275) 20(3.55,2.925)
  silkscreen extent -4.45,-3.6 2.3,3.6, body extent -4.03,-3.6 3.77,3.6, height 1.9
TP [mm] "Test Point"
  rect 1.5x1.5 hole 0.9: 1(0,0)
  silkscreen extent -1.27,-1.27 1.27,1.27

## Part data
C1 C2 C3 C6 C7 C8 C9: library part CL10B104JB8NNNC, "Samsung Electro-Mechanics 0603 100nf"
C4: library part CL10B102KB8NNNL, "Samsung Electro-Mechanics 0603 1nf"
C5: library part CL10B105KA8NNNL, "Samsung Electro-Mechanics 0603 1uf"
H1: "6 Pin 2X3 Through Hole Header"
H2: "16 Pin 2x8 Through Hold IDC Connector", Color=Black, Manufacturer=Samtec, Manufacturer Part Number=TST-108-01-G-D, Max Operating Temperature=125°C, Min Operating Temperature=-55°C, Supplier Part Number 1=SAM10835-ND, Category="Headers and Wire Housings", ComponentLink1Description=https://datasheet.ciiva.com/739/tst-mkt-739845.pdf?src-supplier=Digi-Key, ComponentLink1URL=https://datasheet.ciiva.com/739/tst-mkt-739845.pdf?src-supplier=Digi-Key, ComponentLink2Description=https://datasheet.ciiva.com/10018/htst-10018510.pdf?src-supplier=Avnet, ComponentLink2URL=https://datasheet.ciiva.com/10018/htst-10018510.pdf?src-supplier=Avnet, Connector Type="Male Pin", Contact Material=Bronze, Contact Mating Length=0.25inch, Contact Plating=Gold, Depth=9.27mm, Gender=Male, Housing Color=Black, Housing Material=Polyester, Length=27.94mm, Mount="Through Hole", Number of Contacts=16, Number of Positions=16, Number of Rows=2, Orientation=Straight, Packaging=Rail/Tube, Pitch=2.54mm, Pricing 1="1=2.85000, 10=2.73600, 100=2.28000, 500=1.93800, 1000=1.65300, 5000=1.48200 (USD)", REACH SVHC="No SVHC", RoHS=Yes, Row Spacing=0.1inch, Stock 1=227, Supplier 1=Digi-Key, Termination=Solder
H3: "10 Pin 2x5 Through Hold IDC Connector", Color=Black, Manufacturer=Samtec, Manufacturer Part Number=TST-105-01-G-D, Max Operating Temperature=125°C, Min Operating Temperature=-55°C, Supplier Part Number 1=SAM10835-ND, Category="Headers and Wire Housings", ComponentLink1Description=https://datasheet.ciiva.com/739/tst-mkt-739845.pdf?src-supplier=Digi-Key, ComponentLink1URL=https://datasheet.ciiva.com/739/tst-mkt-739845.pdf?src-supplier=Digi-Key, ComponentLink2Description=https://datasheet.ciiva.com/10018/htst-10018510.pdf?src-supplier=Avnet, ComponentLink2URL=https://datasheet.ciiva.com/10018/htst-10018510.pdf?src-supplier=Avnet, Connector Type="Male Pin", Contact Material=Bronze, Contact Mating Length=0.25inch, Contact Plating=Gold, Depth=9.27mm, Gender=Male, Housing Color=Black, Housing Material=Polyester, Length=27.94mm, Mount="Through Hole", Number of Contacts=16, Number of Positions=16, Number of Rows=2, Orientation=Straight, Packaging=Rail/Tube, Pitch=2.54mm, Pricing 1="1=2.85000, 10=2.73600, 100=2.28000, 500=1.93800, 1000=1.65300, 5000=1.48200 (USD)", REACH SVHC="No SVHC", RoHS=Yes, Row Spacing=0.1inch, Stock 1=227, Supplier 1=Digi-Key, Termination=Solder
IC1: "Integrated Circuit", Manufacturer_Name=Microchip, Manufacturer_Part_Number="AVR64DD32-I/PT | MULTI-VOLTAGE I/O", Datasheet Link=https://www.microchip.com/en-us/product/AVR64DD32, Height=1.2mm
J1 J2 J3 J4 J5 J6: "16 Pin 3x8 Through Hold Jumprts", Color=Black, Manufacturer=Samtec, Manufacturer Part Number=TST-108-01-G-D, Max Operating Temperature=125°C, Min Operating Temperature=-55°C, Category="Headers and Wire Housings", ComponentLink1Description=https://datasheet.ciiva.com/739/tst-mkt-739845.pdf?src-supplier=Digi-Key, ComponentLink1URL=https://datasheet.ciiva.com/739/tst-mkt-739845.pdf?src-supplier=Digi-Key, ComponentLink2Description=https://datasheet.ciiva.com/10018/htst-10018510.pdf?src-supplier=Avnet, ComponentLink2URL=https://datasheet.ciiva.com/10018/htst-10018510.pdf?src-supplier=Avnet, Connector Type="Male Pin", Contact Material=Bronze, Contact Mating Length=0.25inch, Contact Plating=Gold, Depth=9.27mm, Gender=Male, Housing Color=Black, Housing Material=Polyester, Length=27.94mm, Mount="Through Hole", Number of Contacts=16, Number of Positions=16, Number of Rows=2, Orientation=Straight, Packaging=Rail/Tube, Pitch=2.54mm, Pricing 1="1=2.85000, 10=2.73600, 100=2.28000, 500=1.93800, 1000=1.65300, 5000=1.48200 (USD)", REACH SVHC="No SVHC", RoHS=Yes, Row Spacing=0.1inch, Stock 1=227, Supplier 1=Digi-Key, Termination=Solder
J7: library part SD_Micro_Socket, "Memory Card Connectors 9P R/A SMT MICRO SD HINGE PUSH-PULL", Manufacturer_Name=Hirose, Manufacturer_Part_Number=DM3CS-SF, Mouser Part Number=798-DM3CSSF, Datasheet Link=https://datasheet.lcsc.com/szlcsc/Hirose-HRS-DM3CS-SF_C202111.pdf, Geometry.Height=1.83mm, Mouser Price/Stock=https://www.mouser.co.uk/ProductDetail/Hirose-Connector/DM3CS-SF?qs=tTj%252BmQ3KZwbB9K5zh89Rcw%3D%3D
LED1 LED2 LED3 LED4 LED5 LED6 LED7 LED8 LED9 LED10 LED11 LED12 LED13 LED19 LED20 LED21 LED22 LED23 LED24 LED25 LED26 LED27 LED28 LED29: library part 150060GS75000, "Wurth Elektronik 0603 green", Case Code (Imperial)=0603, Case Code (Metric)=1608, Color=Green, Forward Current=30mA, Forward Voltage=3.2V, Manufacturer="Wurth Electronics", Max Operating Temperature=85°C, Min Operating Temperature=-40°C, Package Quantity=4000, Test Current=20mA, Case/Package=0603, Category=LEDs, ComponentLink1Description=https://datasheet.ciiva.com/29562/150060gs75000-29562868.pdf?src-supplier=Digi-Key, ComponentLink1URL=https://datasheet.ciiva.com/29562/150060gs75000-29562868.pdf?src-supplier=Digi-Key, ComponentLink2Description=https://datasheet.ciiva.com/29279/759427-da-01-en-chipled-0603-w-kl-gruen-150060gs75000-29279201.pdf?src-supplier=Conrad, ComponentLink2URL=https://datasheet.ciiva.com/29279/759427-da-01-en-chipled-0603-w-kl-gruen-150060gs75000-29279201.pdf?src-supplier=Conrad, ComponentLink3Description=https://datasheet.ciiva.com/29562/150060gs75000-29562869.pdf?src-supplier=Digi-Key, ComponentLink3URL=https://datasheet.ciiva.com/29562/150060gs75000-29562869.pdf?src-supplier=Digi-Key, ComponentLink4Description=https://datasheet.ciiva.com/29562/150060gs75000-29562870.pdf?src-supplier=Digi-Key, ComponentLink4URL=https://datasheet.ciiva.com/29562/150060gs75000-29562870.pdf?src-supplier=Digi-Key, Dominant Wavelength=520nm, Height=0.7mm, Lead Free="Lead Free", Length=1.6mm, Lens Style=Clear,Rectangular, Luminous Intensity=430mcd, Manufacturer Part Number=150060GS75000, Mount="Surface Mount", Packaging="Tape and Reel", Pricing 1="1=0.14000, 50=0.13300, 100=0.11400, 500=0.09900 (USD)", REACH SVHC=Unknown, RoHS=Yes, Stock 1=71509, Supplier 1=Digi-Key, Viewing Angle=140°, Wavelength=520nm, Width=0.8mm
LED14 LED15: library part 150060RS75000, "Wurth Elektronik 0603 red", Case Code (Imperial)=0603, Case Code (Metric)=1608, Color=Green, Forward Current=30mA, Forward Voltage=3.2V, Manufacturer="Wurth Electronics", Manufacturer Part Number=150060GS75000, Max Operating Temperature=85°C, Min Operating Temperature=-40°C, Package Quantity=4000, Test Current=20mA, Case/Package=0603, Category=LEDs, ComponentLink1Description=https://datasheet.ciiva.com/29562/150060gs75000-29562868.pdf?src-supplier=Digi-Key, ComponentLink1URL=https://datasheet.ciiva.com/29562/150060gs75000-29562868.pdf?src-supplier=Digi-Key, ComponentLink2Description=https://datasheet.ciiva.com/29279/759427-da-01-en-chipled-0603-w-kl-gruen-150060gs75000-29279201.pdf?src-supplier=Conrad, ComponentLink2URL=https://datasheet.ciiva.com/29279/759427-da-01-en-chipled-0603-w-kl-gruen-150060gs75000-29279201.pdf?src-supplier=Conrad, ComponentLink3Description=https://datasheet.ciiva.com/29562/150060gs75000-29562869.pdf?src-supplier=Digi-Key, ComponentLink3URL=https://datasheet.ciiva.com/29562/150060gs75000-29562869.pdf?src-supplier=Digi-Key, ComponentLink4Description=https://datasheet.ciiva.com/29562/150060gs75000-29562870.pdf?src-supplier=Digi-Key, ComponentLink4URL=https://datasheet.ciiva.com/29562/150060gs75000-29562870.pdf?src-supplier=Digi-Key, Dominant Wavelength=520nm, Height=0.7mm, Lead Free="Lead Free", Length=1.6mm, Lens Style=Clear,Rectangular, Luminous Intensity=430mcd, Mount="Surface Mount", Packaging="Tape and Reel", Pricing 1="1=0.14000, 50=0.13300, 100=0.11400, 500=0.09900 (USD)", REACH SVHC=Unknown, RoHS=Yes, Stock 1=71509, Supplier 1=Digi-Key, Viewing Angle=140°, Wavelength=520nm, Width=0.8mm
LED16 LED17: library part 150060AS75000, "Wurth Elektronik 0603 amber", Case Code (Imperial)=0603, Case Code (Metric)=1608, Color=Green, Forward Current=30mA, Forward Voltage=3.2V, Manufacturer="Wurth Electronics", Manufacturer Part Number=150060GS75000, Max Operating Temperature=85°C, Min Operating Temperature=-40°C, Package Quantity=4000, Test Current=20mA, Case/Package=0603, Category=LEDs, ComponentLink1Description=https://datasheet.ciiva.com/29562/150060gs75000-29562868.pdf?src-supplier=Digi-Key, ComponentLink1URL=https://datasheet.ciiva.com/29562/150060gs75000-29562868.pdf?src-supplier=Digi-Key, ComponentLink2Description=https://datasheet.ciiva.com/29279/759427-da-01-en-chipled-0603-w-kl-gruen-150060gs75000-29279201.pdf?src-supplier=Conrad, ComponentLink2URL=https://datasheet.ciiva.com/29279/759427-da-01-en-chipled-0603-w-kl-gruen-150060gs75000-29279201.pdf?src-supplier=Conrad, ComponentLink3Description=https://datasheet.ciiva.com/29562/150060gs75000-29562869.pdf?src-supplier=Digi-Key, ComponentLink3URL=https://datasheet.ciiva.com/29562/150060gs75000-29562869.pdf?src-supplier=Digi-Key, ComponentLink4Description=https://datasheet.ciiva.com/29562/150060gs75000-29562870.pdf?src-supplier=Digi-Key, ComponentLink4URL=https://datasheet.ciiva.com/29562/150060gs75000-29562870.pdf?src-supplier=Digi-Key, Dominant Wavelength=520nm, Height=0.7mm, Lead Free="Lead Free", Length=1.6mm, Lens Style=Clear,Rectangular, Luminous Intensity=430mcd, Mount="Surface Mount", Packaging="Tape and Reel", Pricing 1="1=0.14000, 50=0.13300, 100=0.11400, 500=0.09900 (USD)", REACH SVHC=Unknown, RoHS=Yes, Stock 1=71509, Supplier 1=Digi-Key, Viewing Angle=140°, Wavelength=520nm, Width=0.8mm
LED18: library part 150060BS75000, "Wurth Elektronik 0603 blue", Case Code (Imperial)=0603, Case Code (Metric)=1608, Color=Green, Forward Current=30mA, Forward Voltage=3.2V, Manufacturer="Wurth Electronics", Manufacturer Part Number=150060GS75000, Max Operating Temperature=85°C, Min Operating Temperature=-40°C, Package Quantity=4000, Test Current=20mA, Case/Package=0603, Category=LEDs, ComponentLink1Description=https://datasheet.ciiva.com/29562/150060gs75000-29562868.pdf?src-supplier=Digi-Key, ComponentLink1URL=https://datasheet.ciiva.com/29562/150060gs75000-29562868.pdf?src-supplier=Digi-Key, ComponentLink2Description=https://datasheet.ciiva.com/29279/759427-da-01-en-chipled-0603-w-kl-gruen-150060gs75000-29279201.pdf?src-supplier=Conrad, ComponentLink2URL=https://datasheet.ciiva.com/29279/759427-da-01-en-chipled-0603-w-kl-gruen-150060gs75000-29279201.pdf?src-supplier=Conrad, ComponentLink3Description=https://datasheet.ciiva.com/29562/150060gs75000-29562869.pdf?src-supplier=Digi-Key, ComponentLink3URL=https://datasheet.ciiva.com/29562/150060gs75000-29562869.pdf?src-supplier=Digi-Key, ComponentLink4Description=https://datasheet.ciiva.com/29562/150060gs75000-29562870.pdf?src-supplier=Digi-Key, ComponentLink4URL=https://datasheet.ciiva.com/29562/150060gs75000-29562870.pdf?src-supplier=Digi-Key, Dominant Wavelength=520nm, Height=0.7mm, Lead Free="Lead Free", Length=1.6mm, Lens Style=Clear,Rectangular, Luminous Intensity=430mcd, Mount="Surface Mount", Packaging="Tape and Reel", Pricing 1="1=0.14000, 50=0.13300, 100=0.11400, 500=0.09900 (USD)", REACH SVHC=Unknown, RoHS=Yes, Stock 1=71509, Supplier 1=Digi-Key, Viewing Angle=140°, Wavelength=520nm, Width=0.8mm
M1 M2: library part Logic_Level_Module, "Logic Level Converter Module"
R1 R2 R3 R4 R5 R6 R7 R8 R12 R13 R17 R18 R19 R20 R21 R22 R23 R24 R25 R26 R27 R28 R29 R30 R31 R32 R33 R34 R35 R36 R37 R38 R39 R40 R41 R42 R43 R44 R45 R46 R47 R48 R49 R50 R51 R52 R53 R54 R55 R63 R64 R65 R66 R67 R68 R69 R70 R71 R72 R73 R74 R75 R76 R93 R94 R95 R96 R97 R98 R112 R113 R114 R115 R116 R117 R118 R119 R120 R121 R122 R123 R124 R125 R126 R127 R128: library part RC0603JR-070RL, "YAGEO 0603 0 ohm", Manufacturer_Name=KEMET, Mouser Part Number=603-RC0603JR-070RL, Datasheet Link=https://datasheet.datasheetarchive.com/originals/distributors/Datasheets_SAMA/902f9e387b938f871d31120f5fc1d65e.pdf, Geometry.Height=0.55mm, Manufacturer_Part_Number=RC0603JR-070RL, Mouser Price/Stock=https://www.mouser.co.uk/ProductDetail/YAGEO/RC0603JR-070RL?qs=2cAdsCoAWRGWyPcuXgGiXQ%3D%3D
R9 R10 R11 R14 R15 R16 R56 R57 R58 R59 R60 R61 R62: library part RC0603FR-104K7L, "YAGEO 0603 4.7k", Manufacturer_Name=KEMET, Manufacturer_Part_Number=RC0603JR-070RL, Mouser Part Number=603-RC0603JR-070RL, Datasheet Link=https://datasheet.datasheetarchive.com/originals/distributors/Datasheets_SAMA/902f9e387b938f871d31120f5fc1d65e.pdf, Geometry.Height=0.55mm, Mouser Price/Stock=https://www.mouser.co.uk/ProductDetail/YAGEO/RC0603JR-070RL?qs=2cAdsCoAWRGWyPcuXgGiXQ%3D%3D
R77 R78 R79 R80 R81 R82 R83 R85 R86 R87 R88 R89 R90 R91 R92 R99 R101 R102 R103 R104 R105 R106 R107 R108 R109 R110 R111: library part RC0603FR-13180RL, "YAGEO 0603 180 ohm", Manufacturer_Name=KEMET, Manufacturer_Part_Number=RC0603JR-070RL, Mouser Part Number=603-RC0603JR-070RL, Datasheet Link=https://datasheet.datasheetarchive.com/originals/distributors/Datasheets_SAMA/902f9e387b938f871d31120f5fc1d65e.pdf, Geometry.Height=0.55mm, Mouser Price/Stock=https://www.mouser.co.uk/ProductDetail/YAGEO/RC0603JR-070RL?qs=2cAdsCoAWRGWyPcuXgGiXQ%3D%3D
R84: library part RC0603FR-0747KL, "YAGEO 0603 47", Manufacturer_Name=KEMET, Manufacturer_Part_Number=RC0603JR-070RL, Mouser Part Number=603-RC0603JR-070RL, Datasheet Link=https://datasheet.datasheetarchive.com/originals/distributors/Datasheets_SAMA/902f9e387b938f871d31120f5fc1d65e.pdf, Geometry.Height=0.55mm, Mouser Price/Stock=https://www.mouser.co.uk/ProductDetail/YAGEO/RC0603JR-070RL?qs=2cAdsCoAWRGWyPcuXgGiXQ%3D%3D
R100: library part RC0603FR-10100RL, "YAGEO 0603 100 ohm", Manufacturer_Name=KEMET, Manufacturer_Part_Number=RC0603JR-070RL, Mouser Part Number=603-RC0603JR-070RL, Datasheet Link=https://datasheet.datasheetarchive.com/originals/distributors/Datasheets_SAMA/902f9e387b938f871d31120f5fc1d65e.pdf, Geometry.Height=0.55mm, Mouser Price/Stock=https://www.mouser.co.uk/ProductDetail/YAGEO/RC0603JR-070RL?qs=2cAdsCoAWRGWyPcuXgGiXQ%3D%3D
TP1 TP2 TP3 TP4 TP5 TP6 TP7 TP8 TP9 TP10 TP11 TP12 TP13 TP14 TP15: Color=Black, Manufacturer=Samtec, Manufacturer Part Number=TST-105-01-G-D, Max Operating Temperature=125°C, Min Operating Temperature=-55°C, Category="Headers and Wire Housings", ComponentLink1Description=https://datasheet.ciiva.com/739/tst-mkt-739845.pdf?src-supplier=Digi-Key, ComponentLink1URL=https://datasheet.ciiva.com/739/tst-mkt-739845.pdf?src-supplier=Digi-Key, ComponentLink2Description=https://datasheet.ciiva.com/10018/htst-10018510.pdf?src-supplier=Avnet, ComponentLink2URL=https://datasheet.ciiva.com/10018/htst-10018510.pdf?src-supplier=Avnet, Connector Type="Male Pin", Contact Material=Bronze, Contact Mating Length=0.25inch, Contact Plating=Gold, Depth=9.27mm, Gender=Male, Housing Color=Black, Housing Material=Polyester, Length=27.94mm, Mount="Through Hole", Number of Contacts=16, Number of Positions=16, Number of Rows=2, Orientation=Straight, Packaging=Rail/Tube, Pitch=2.54mm, Pricing 1="1=2.85000, 10=2.73600, 100=2.28000, 500=1.93800, 1000=1.65300, 5000=1.48200 (USD)", REACH SVHC="No SVHC", RoHS=Yes, Row Spacing=0.1inch, Stock 1=227, Supplier 1=Digi-Key, Termination=Solder
U1: "Octal Buffers/Drivers With 3-State Outputs", Manufacturer_Name="Texas Instruments", Mouser Part Number=595-SN74ABT240ADBR, Datasheet Link=http://www.ti.com/lit/gpn/sn74abt240a, Geometry.Height=2mm, Manufacturer_Part_Number=SN74ABT240ADBR, Mouser Price/Stock=https://www.mouser.co.uk/ProductDetail/Texas-Instruments/SN74ABT240ADBR?qs=JHHQeKcAU3Dt82k%252BVyiYdw%3D%3D
U2 U3 U4: "Hex Inverters", Manufacturer_Name="Texas Instruments", Mouser Part Number=595-SN74AC04PWR, Datasheet Link=http://www.ti.com/lit/gpn/sn74ac04, Geometry.Height=1.2mm, Manufacturer_Part_Number=SN74AC04PWR, Mouser Price/Stock=https://www.mouser.co.uk/ProductDetail/Texas-Instruments/SN74AC04PWR?qs=RZS%252BpEsUn7pRvPNqsga4SA%3D%3D

## Free pads (board coordinates)
  round 200 hole 170: 37(200,200) 37(200,3800) 37(5400,200) 37(5400,3800)

## Via types
v1: diameter 50, hole 28, Top Layer to Bottom Layer, 167 vias

## Nets (pads, with @x,y where several pads share a name; then routed paths per layer and width w, separated by ;. In a path a pad name is that pad's centre, name@x,y a point inside that pad or via, vN(x,y) a via of type N, cw(c..) or ccw(c..) an arc to the next point about the centre after c; other vN are vias at no path point)
+3.3: C8.1 C9.1 H2.3 J7.4 M1.3 M2.3 R56.2 R57.2 R58.2 R59.2 R60.2 R61.2 R84.1 | length 16866.7
  Top Layer w10: H2.3@200,1800 115.86,1800 110,1805.86 110,2060 670,2620 670,3804.14 675.86,3810 5110,3810 5150,3770 5150,3190 5160,3180 v1(5220,3180) ; M2.3@3500,500 3500,614.14 3505.86,620 3940,620 4290,620 4300,610 M1.3@4300,500 ; R61.2@4000,1731.5 R60.2@4100,1731.5 R59.2@4200,1731.5 R58.2@4300,1731.5 R57.2@4400,1731.5 R56.2@4500,1731.5 4500,1810 4580,1890 v1(4580,2400) ; v1(4890,810) 4910,810 4971.31,871.31 J7.4@5091.52,871.31
  Bottom Layer w10: H2.3@200,1800 115.86,1800 110,1794.14 110,1005.86 115.86,1000 850,1000 975,875 975,873.79 1248.79,600 3500,600 ; M2.3@3500,500 3500,600 ; C8.1@3538.5,600 3500,600 ; M1.3@4300,500 4300,594.14 ; C9.1@4338.5,600 4305.86,600 4300,594.14 ; v1(4580,2400) 4690,2510 5194.14,2510 5220,2535.86 v1(5220,3180) R84.1@5220,3343.5 ; v1(4890,810) 4739.5,810 4589.5,660 4305.86,660 4300,654.14 4300,594.14
+5: C1.1 C2.1 C3.1 C4.1 C5.1 C6.1 C7.1 H1.2 H2.1 H3.2 IC1.10 IC1.18 IC1.28 M1.10 M2.10 R9.2 R10.2 R11.2 R14.2 R15.2 R16.1 R62.2 R77.2 R78.2 R79.2 R80.2 R81.2 R82.2 R83.2 R85.2 R86.2 R87.2 R88.2 R89.2 R90.2 R91.2 R92.2 R99.2 R100.1 R101.2 R102.2 R103.2 R104.2 R105.2 R106.2 R107.2 R108.2 R109.2 R110.2 R111.2 U1.20 U2.14 U3.14 U4.14 | length 7275.1
  Top Layer w10: U1.20@1289.76,2615.16 1289.76,2688.67 1315,2713.9 v1(1315,2720) ; v1@2097.65,1383.51 2100,1385.86 2100,1410 2111.26,1421.26 IC1.10@2111.26,1473.15 ; U2.14@2115.67,2676.77 2115.67,2734.14 2121.53,2740 v1(2200,2740) ; IC1.28@2205.75,1806.85 2205.75,1734.25 2220,1720 v1(2240,1720) 2240,1567.12 2245.86,1561.26 IC1.18@2356.85,1561.26 ; U3.14@3265.67,2676.77 3265.67,2705.67 3312.35,2752.35 3332.35,2752.35 v1(3340,2760) ; U4.14@4465.67,2676.77 4465.67,2745.67 4480,2760 v1(4480,2770) ; v1(4680,300) 4680,360 4720,400 R62.2@4768.5,400 ; R15.2@4700,2311.5 4700,2310 4810,2310 ; v1(4810,2200) 4810,2310 ; R16.1@5300,2311.5 R9.2@5200,2311.5 R11.2@5100,2311.5 R14.2@5000,2311.5 R10.2@4900,2311.5 4898.5,2310 4810,2310
  Bottom Layer w10: R92.2@750,3343.5 R91.2@850,3343.5 R90.2@950,3343.5 R89.2@1050,3343.5 R88.2@1150,3343.5 R87.2@1250,3343.5 R86.2@1350,3343.5 R85.2@1450,3343.5 1523.5,3343.5 1530,3350 v1(1530,3500) ; R99.2@1625,3343.5 R100.1@1775,3343.5 R102.2@1925,3343.5 R80.2@2050,3343.5 R81.2@2180,3343.5 2263.5,3343.5 2280,3360 v1(2280,3490) ; v1(2090,1360) 2090,1370.82 2121.5,1402.32 C5.1@2121.5,1570 ; v1(2240,1720) 2210,1690 2188.5,1690 ; R77.2@2420,3343.5 R78.2@2630,3343.5 R104.2@2830,3343.5 R105.2@3050,3343.5 R101.2@3290,3343.5 3390,3343.5 ; v1(3390,3420) 3390,3343.5 ; C2.1@3498.5,800 3498.5,892.2 M2.10@3500,893.7 ; R82.2@3870,3343.5 R79.2@3510,3343.5 3390,3343.5 ; R111.2@4160,3343.5 R110.2@4300,3343.5 R107.2@4500,3343.5 R108.2@4680,3343.5 R109.2@4860,3343.5 R103.2@5005,3343.5 5083.5,3343.5 5090,3350 v1(5090,3500) ; C1.1@4298.5,790 4300,791.5 M1.10@4300,893.7 ; v1(5350,3220) 5350,3337.65 5355.86,3343.5 R83.2@5470,3343.5 ; C5.1@2121.5,1570 C3.1@2188.5,1570 C4.1@2188.5,1640 2188.5,1690 ; C5.1@2121.5,1570 C6.1@2121.5,1630 C7.1@2121.5,1690 2188.5,1690
CPU_CS: R18.2 R47.2 R121.1 | length 4858.1
  Top Layer w10: R18.2@1031.5,1450 v1(1200,1450) ; v1(1420,2880) 1420,2805.86 1425.86,2800 1870,2800 1925,2855 R121.1@1925,2978.5 ; R47.2@2240,1178.5 2240,870.82 2250,860.82 v1(2250,850)
  Bottom Layer w10: v1(1420,2880) 1417.57,2882.43 1417.57,2924.14 1411.72,2930 1270,2930 1200,2860 1200,1710 1260,1650 1260,1510 v1(1200,1450) 1085.86,1450 1080,1444.14 1080,940 1220,800 1970,800 2020,850 v1(2250,850)
CPU_D0: R4.1 R23.1 U1.2 | length 2703.3
  Top Layer w10: R4.1@631.5,1900 631.5,2531.5 689.57,2589.57 U1.2@1010.24,2589.57 ; v1(840,2180) 2120,2180 2135.86,2195.86 2144.14,2195.86 2150,2190 R23.1@2150,2050
  Bottom Layer w10: v1(630,2180) v1(840,2180)
CPU_D1: R6.1 R25.1 U1.4 | length 3267.2
  Top Layer w10: v1(480,1850) 594.14,1850 600,1844.14 600,1805.86 605.86,1800 R6.1@631.5,1800 694.14,1800 700,1805.86 700,2532.53 705.86,2538.39 U1.4@1010.24,2538.39 ; v1(1030,2000) 1120,2000 1285,2165 2094.14,2165 2100,2159.14 2100,2060 R25.1@2090,2050
  Bottom Layer w10: v1(480,1850) 480,2000 490,2010 1020,2010 v1(1030,2000)
CPU_D2: R7.1 R27.1 U1.6 | length 2863
  Top Layer w10: R7.1@631.5,1700 711.35,1700 ; U1.6@1010.24,2487.2 735.86,2487.2 730,2481.35 730,1718.65 711.35,1700 ; v1(1100,1930) 1310,2140 2024.14,2140 2030,2134.14 R27.1@2030,2051.5 ; v1(1110,1830) 1110,1740 1070,1700 711.35,1700
  Bottom Layer w10: v1(1100,1930) 1100,1855.86 1102.35,1853.51 1102.35,1837.65 v1(1110,1830)
CPU_D3: R12.1 R29.1 U1.8 | length 2280.4
  Top Layer w10: R12.1@631.5,1600 v1(810,1600) ; U1.8@1010.24,2436.02 775.86,2436.02 770,2430.17 v1(770,1940) 820,1940 880,1880 1296.38,1880 1316.38,1860 R29.1@1743.5,1860
  Bottom Layer w10: v1(770,1940) 772.43,1937.57 772.43,1627.57 800,1600 v1(810,1600)
CPU_D4: R17.1 R31.1 U1.11 | length 1973.5
  Top Layer w10: R17.1@631.5,1500 1240,1500 1250,1510 1250,1770 1280,1800 v1(1290,1800) R31.1@1743.5,1800 ; U1.11@1289.76,2384.84 1289.76,2310.24 v1(1290,2310)
  Bottom Layer w10: v1(1290,1800) v1(1290,2310)
CPU_D5: R19.1 R33.1 U1.13 | length 2223.7
  Top Layer w10: R19.1@631.5,1400 1294.14,1400 1300,1405.86 1300,1710 1330,1740 v1(1390,1740) R33.1@1743.5,1740 ; U1.13@1289.76,2436.02 1383.98,2436.02 v1(1390,2430)
  Bottom Layer w10: v1(1390,1740) v1(1390,2430)
CPU_D6: R21.1 R35.1 U1.15 | length 2447.4
  Top Layer w10: R21.1@631.5,1300 1320,1300 1370,1350 1370,1674.14 1375.86,1680 v1(1510,1680) R35.1@1743.5,1680 ; U1.15@1289.76,2487.2 1442.8,2487.2 v1(1450,2480)
  Bottom Layer w10: v1(1450,2480) 1457.65,2472.35 1457.65,2456.49 1460,2454.14 1460,1730 v1(1510,1680)
CPU_D7: R22.1 R37.1 U1.17 | length 2850.3
  Top Layer w10: R22.1@631.5,1200 1440,1200 1450,1210 v1(1450,1610) 1460.82,1610 1470.82,1620 R37.1@1743.5,1620 ; U1.17@1289.76,2538.39 1511.61,2538.39 1530,2520 1530,2370 1510,2350 v1(1510,2250)
  Bottom Layer w10: v1(1450,1610) 1457.65,1617.65 1473.51,1617.65 1475.86,1620 1570,1620 1600,1650 1600,2160 1577.65,2182.35 v1(1510,2250)
CPU_nInt: R8.2 R49.2 R112.1 | length 4354.2
  Top Layer w10: R8.2@1031.5,1650 v1(1170,1650) ; v1(1290,2980) 1291.5,2978.5 R112.1@1625,2978.5 ; v1(2120,770) R49.2@2120,1178.5
  Bottom Layer w10: v1(1290,2980) 1170,2860 v1(1170,1650) 1230,1590 1230,1520 1210,1500 1035.86,1500 1030,1494.14 1030,920 1180,770 v1(2120,770)
CPU_Reset: H3.1 R20.2 R26.2 R115.1 | length 5584.9
  Top Layer w10: R20.2@1031.5,1350 v1(1180,1350) ; v1(1530,2870) 1769.14,2870 1775,2875.86 R115.1@1775,2978.5 ; R26.2@2330,2051.5 v1(2330,2324.14) 2335.86,2330 3670,2330 3900,2100 H3.1@4000,2100
  Bottom Layer w10: v1(1180,1350) 1280,1350 1340,1410 1340,2610 1530,2800 v1(1530,2870) 2004.14,2870 2010,2864.14 2010,2358.28 2044.14,2324.14 v1(2330,2324.14)
CPU_RnW: R13.2 R48.2 R96.1 | length 4718.5
  Top Layer w10: R13.2@1031.5,1550 1041.5,1560 v1(1160,1560) ; v1(2180,710) v1(2180,1000) R48.2@2180,1178.5 ; R96.1@2381.5,2500 2420,2500 2440,2480 v1(2440,2460) ; v1@2460,1390 2460,1383.32 2479.18,1364.14 2479.18,1031.65 2490,1020.82 v1(2490,1010)
  Bottom Layer w10: v1(1160,1560) 995.86,1560 990,1554.14 990,880 1160,710 v1(2180,710) ; v1(2180,1000) 2469.18,1000 2479.18,1010 v1(2490,1010) ; v1(2440,2460) 2540,2360 2540,2273.79 2600,2213.79 2600,1700 2590,1690 2590,1491.21 2568.79,1470 2530,1470 2460,1400 v1@2460,1390
  other v1: 2460,1380
GND: C1.2 C2.2 C3.2 C4.2 C5.2 C6.2 C7.2 C8.2 C9.2 H1.6 H2.13 H2.15 H3.8 H3.10 IC1.19 IC1.29 J7.6 J7.MP1 J7.MP2 J7.MP3 J7.MP4 LED15.1 LED16.1 M1.4 M1.9 M2.4 M2.9 U1.1 U1.10 U1.19 U2.7 U3.7 U4.7 | length 4268.7
  Top Layer w10: v1(910,2690) 979.8,2620.2 979.8,2619.02 983.66,2615.16 U1.1@1010.24,2615.16 ; U1.10@1005.16,2384.84 U1.10@1006.14,2384.84 ; v1(1010,2270) 1010,2380.98 U1.10@1006.14,2384.84 ; U1.10@1010.24,2384.84 U1.10@1006.14,2384.84 ; U1.19@1289.76,2589.57 1245.86,2589.57 1240,2595.42 1240,2770 1292.35,2822.35 1312.35,2822.35 v1(1320,2830) ; v1(1830,2420) 1878.47,2420 1884.33,2425.86 U2.7@1884.33,2523.23 ; IC1.29@2174.25,1806.85 2174.25,1884.25 v1(2200,1910) ; IC1.19@2356.85,1592.76 2447.24,1592.76 2465.86,1574.14 2465.86,1544.14 v1(2470,1540) ; v1(2930,2480) 2940.19,2480 2955.86,2464.33 3028.47,2464.33 3034.33,2470.19 U3.7@3034.33,2523.23 ; v1(4190,2440) 4190.86,2439.14 4199.14,2439.14 4234.33,2474.33 U4.7@4234.33,2523.23 ; J7.6@5091.52,784.7 5174.7,784.7 5220,830 v1(5220,860) ; J7.MP2@5111.2,580 v1(5111.2,431.2) 5451.2,431.2 5509.34,489.34 5509.34,565.86 J7.MP4@5523.48,580 ; J7.MP1@5123.48,1180 5320,1180 5360,1220 J7.MP3@5523.48,1220 5510,1233.48 5510,1320 v1(5440,1390) ; LED16.1@5220,3343.5 5345,3343.5 ; v1(5350,3410) 5350,3348.5 5345,3343.5 ; LED15.1@5470,3343.5 5345,3343.5
  Bottom Layer w10: v1@900,2690 v1(910,2690) ; C5.2@2058.5,1570 C6.2@2058.5,1630 C7.2@2058.5,1690 2069.25,1700.75 2069.25,1708.81 2070,1709.56 2070,1794.14 2174.64,1898.79 2177.96,1898.79 2189.18,1910 v1(2200,1910) ; C4.2@2251.5,1640 C3.2@2251.5,1570 2251.5,1567.05 2262.24,1556.3 2265.2,1556.3 2281.5,1540 v1(2470,1540) ; C2.2@3561.5,800 3594.14,800 3600,805.86 M2.9@3600,893.7 ; M2.4@3600,500 3601.5,501.5 C8.2@3601.5,600 ; C1.2@4361.5,790 4404.14,790 4410,795.86 4410,867.84 4407.65,870.19 4407.65,886.05 M1.9@4400,893.7 ; M1.4@4400,500 4400,598.5 C9.2@4401.5,600 ; v1@5110,430 v1(5111.2,431.2)
NetH1_1: H1.1 R1.2 | length 163.5
  Top Layer w10: R1.2@3181.5,2100 H1.1@3345,2100
NetH1_3: H1.3 R2.2 | length 175.9
  Top Layer w10: R2.2@3181.5,2030 3250,2030 3280,2000 H1.3@3345,2000
NetH1_4: H1.4 R3.1 | length 685.6
  Top Layer w10: R3.1@3181.5,1890 3181.5,1887.05 3192.24,1876.3 3195.2,1876.3 3291.5,1780 3524.14,1780 ; H1.4@3445,2000 3524.14,2000 3530,1994.14 3530,1785.86
NetH1_5: H1.5 R5.2 | length 188.4
  Top Layer w10: R5.2@3181.5,1960 3230,1960 3290,1900 H1.5@3345,1900
NetH2_2: H2.2 R4.2 | length 268.5
  Top Layer w10: H2.2@300,1900 R4.2@568.5,1900
NetH2_4: H2.4 R6.2 | length 268.5
  Top Layer w10: H2.4@300,1800 R6.2@568.5,1800
NetH2_5: H2.5 R8.1 | length 789.2
  Top Layer w10: H2.5@200,1700 250,1650 R8.1@968.5,1650
NetH2_6: H2.6 R7.2 | length 268.5
  Top Layer w10: H2.6@300,1700 R7.2@568.5,1700
NetH2_7: H2.7 R13.1 | length 795.1
  Top Layer w10: H2.7@200,1600 200,1590 240,1550 R13.1@968.5,1550
NetH2_8: H2.8 R12.2 | length 268.5
  Top Layer w10: H2.8@300,1600 R12.2@568.5,1600
NetH2_9: H2.9 R18.1 | length 789.2
  Top Layer w10: H2.9@200,1500 250,1450 R18.1@968.5,1450
NetH2_10: H2.10 R17.2 | length 268.5
  Top Layer w10: H2.10@300,1500 R17.2@568.5,1500
NetH2_11: H2.11 R20.1 | length 789.2
  Top Layer w10: H2.11@200,1400 250,1350 R20.1@968.5,1350
NetH2_12: H2.12 R19.2 | length 268.5
  Top Layer w10: H2.12@300,1400 R19.2@568.5,1400
NetH2_14: H2.14 R21.2 | length 268.5
  Top Layer w10: H2.14@300,1300 R21.2@568.5,1300
NetH2_16: H2.16 R22.2 | length 268.5
  Top Layer w10: H2.16@300,1200 R22.2@568.5,1200
NetIC1_1: IC1.1 R29.2 | length 262.1
  Top Layer w10: R29.2@1806.5,1860 1860,1860 1890,1830 1969.76,1750.24 IC1.1@2023.15,1750.24
NetIC1_2: IC1.2 R31.2 | length 250.3
  Top Layer w10: R31.2@1806.5,1800 1860,1800 1941.26,1718.74 IC1.2@2023.15,1718.74
NetIC1_3: IC1.3 R33.2 | length 238.5
  Top Layer w10: R33.2@1806.5,1740 1870,1740 1920,1690 2020.39,1690 IC1.3@2023.15,1687.24
NetIC1_4: IC1.4 R35.2 | length 226.7
  Top Layer w10: R35.2@1806.5,1680 1880,1680 1900,1660 2018.9,1660 IC1.4@2023.15,1655.75
NetIC1_5: IC1.5 R37.2 | length 218.4
  Top Layer w10: R37.2@1806.5,1620 1810.75,1624.25 IC1.5@2023.15,1624.25
NetIC1_6: IC1.6 R40.2 | length 230.2
  Top Layer w10: R40.2@1806.5,1560 1900,1560 1932.76,1592.76 IC1.6@2023.15,1592.76
NetIC1_7: IC1.7 R42.2 | length 256.2
  Top Layer w10: R42.2@1806.5,1500 1914.14,1500 1920,1505.86 1920,1530 1951.26,1561.26 IC1.7@2023.15,1561.26
NetIC1_8: IC1.8 R44.2 | length 275.3
  Top Layer w10: R44.2@1806.5,1440 1970,1440 2023.15,1493.15 IC1.8@2023.15,1529.76
NetIC1_9: IC1.9 R46.2 | length 276.3
  Top Layer w10: R46.2@2060,1241.5 2060,1300 2030,1330 2030,1443.15 2040,1453.15 2058.81,1471.96 2078.57,1471.96 IC1.9@2079.76,1473.15
NetIC1_11: IC1.11 R49.1 | length 241.1
  Top Layer w10: R49.1@2120,1241.5 2120,1284.7 2142.76,1307.46 IC1.11@2142.76,1473.15
NetIC1_12: IC1.12 R48.1 | length 234
  Top Layer w10: IC1.12@2174.25,1473.15 2174.25,1247.24 R48.1@2180,1241.5
NetIC1_13: IC1.13 R47.1 | length 245.8
  Top Layer w10: IC1.13@2205.75,1473.15 2205.75,1324.25 2240,1290 R47.1@2240,1241.5
NetIC1_14: IC1.14 R45.1 | length 257.6
  Top Layer w10: IC1.14@2237.24,1473.15 2237.24,1352.76 2300,1290 R45.1@2300,1241.5
NetIC1_15: IC1.15 R43.1 | length 269.5
  Top Layer w10: IC1.15@2268.74,1473.15 2268.74,1361.26 2360,1270 R43.1@2360,1241.5
NetIC1_16: IC1.16 R41.1 | length 281.3
  Top Layer w10: IC1.16@2300.24,1473.15 2300.24,1389.76 2413.61,1276.39 2413.61,1247.88 R41.1@2420,1241.5
NetIC1_17: IC1.17 R39.1 | length 260.4
  Top Layer w10: IC1.17@2356.85,1529.76 2356.85,1485.86 2362.71,1480 2528.5,1480 R39.1@2558.5,1510
NetIC1_20: IC1.20 R38.1 | length 224.1
  Top Layer w10: IC1.20@2356.85,1624.25 2475.75,1624.25 2530,1570 R38.1@2558.5,1570
NetIC1_21: IC1.21 R36.1 | length 212.3
  Top Layer w10: IC1.21@2356.85,1655.75 2484.25,1655.75 2510,1630 R36.1@2558.5,1630
NetIC1_22: IC1.22 R34.1 | length 202.8
  Top Layer w10: IC1.22@2356.85,1687.24 2359.61,1690 R34.1@2558.5,1690
NetIC1_23: IC1.23 R32.1 | length 214.6
  Top Layer w10: IC1.23@2356.85,1718.74 2448.74,1718.74 2480,1750 R32.1@2558.5,1750
NetIC1_24: IC1.24 R30.1 | length 234.7
  Top Layer w10: IC1.24@2356.85,1750.24 2430.24,1750.24 2500,1820 2548.5,1820 R30.1@2558.5,1810
NetIC1_25: IC1.25 R28.1 | length 218.8
  Top Layer w10: IC1.25@2300.24,1806.85 2300.24,1850.24 2390,1940 R28.1@2390,1988.5